# Altium PCB PCB2.PcbDoc
Units mil, origin at the board's own origin, x right, y up, seen from the top; angles counter-clockwise.
Board outline 3000 x 3000 mil, 4 copper layers (Top Layer, Power, GND, Bottom Layer), stack 23.756 mil thick; 81 components, 61 nets, 405 pads, 123 vias.
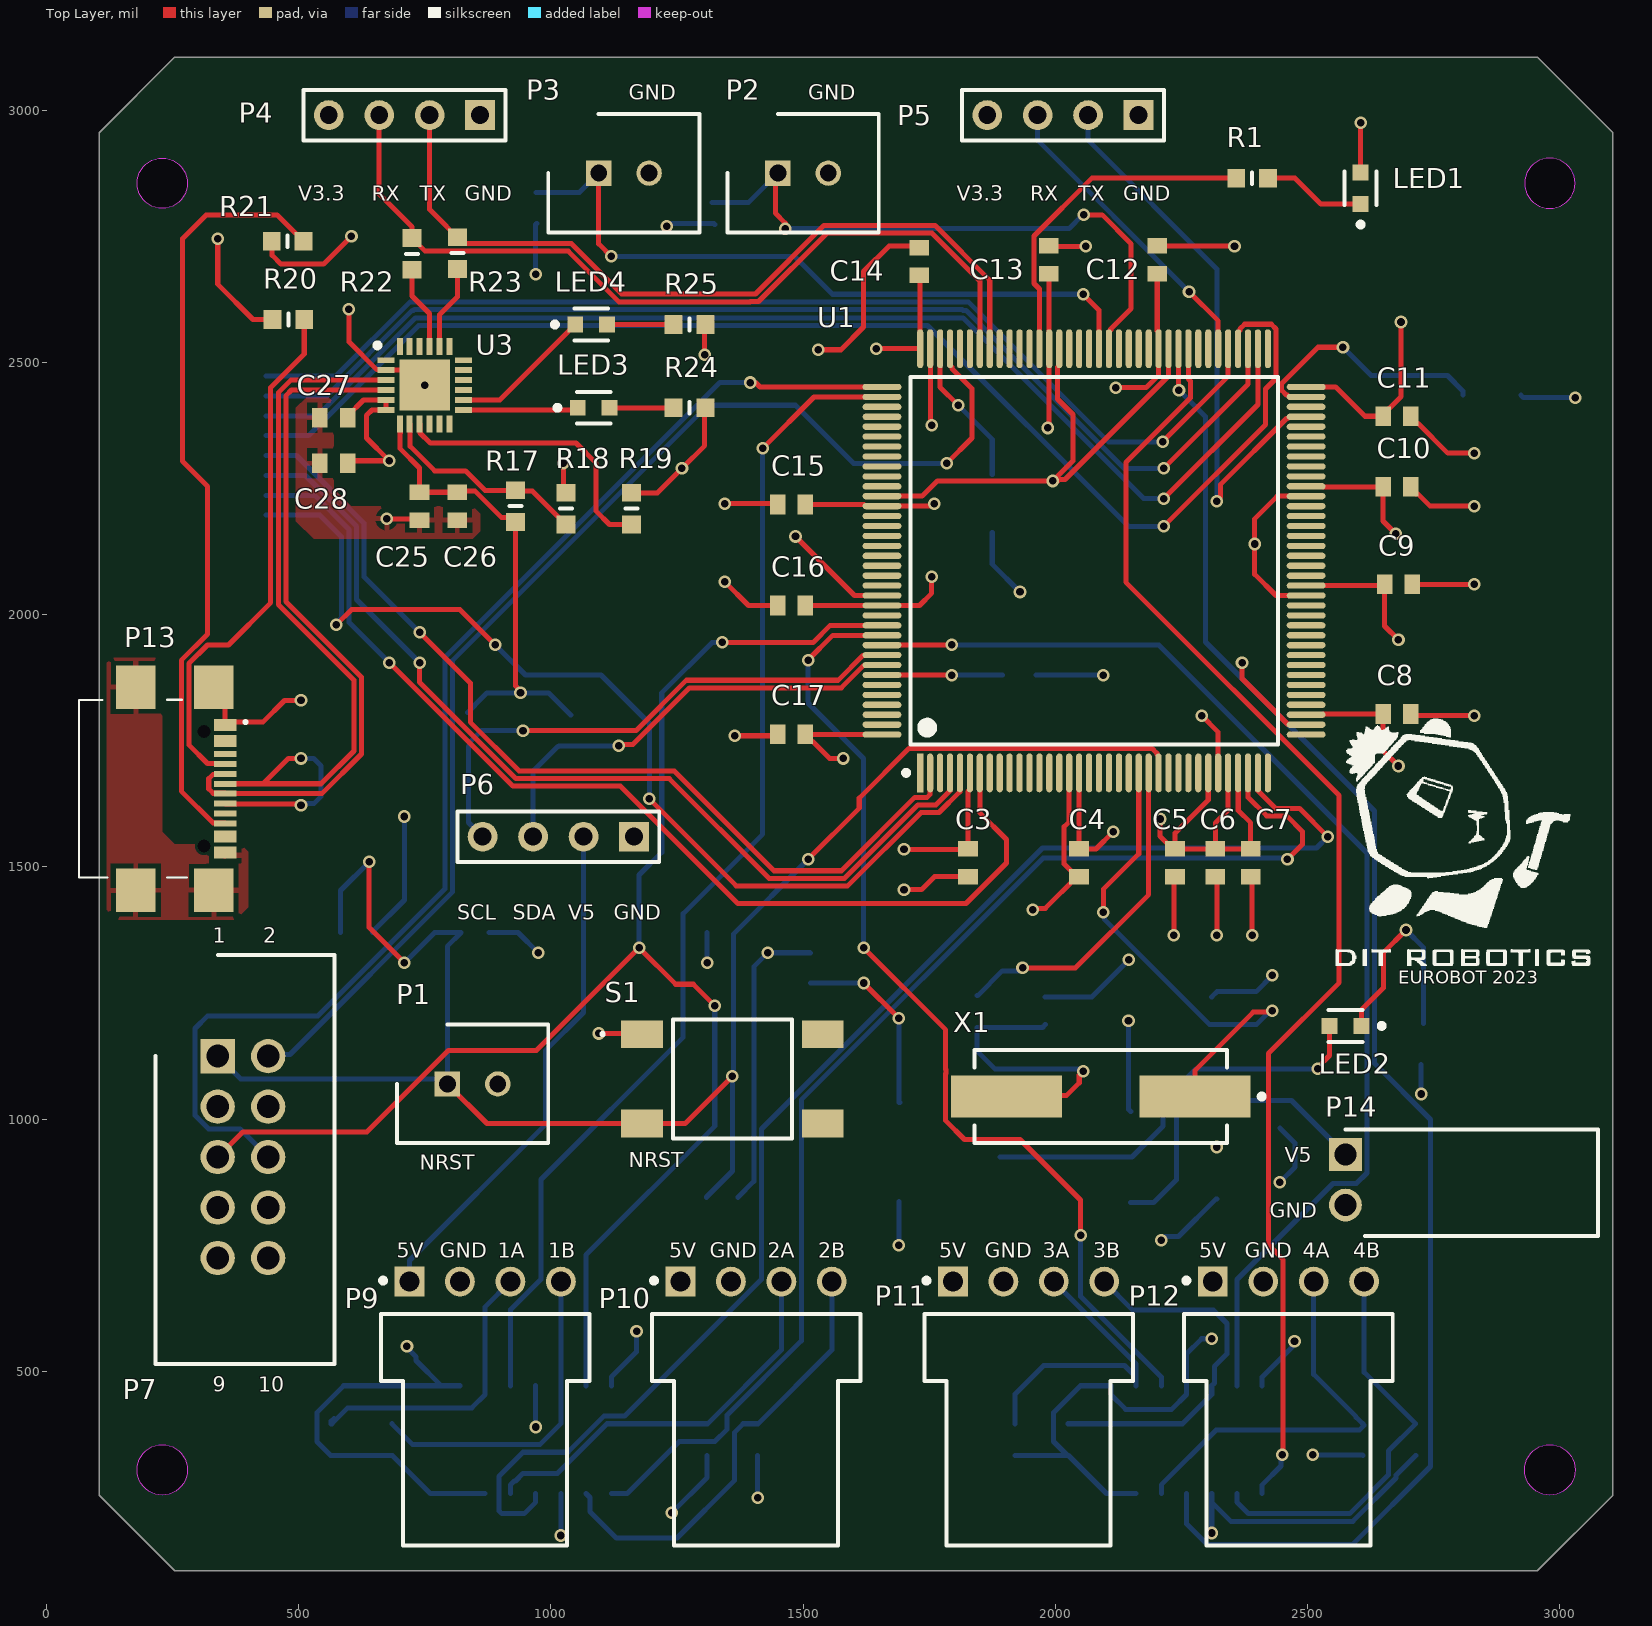
[diagram p0: Top Layer view]
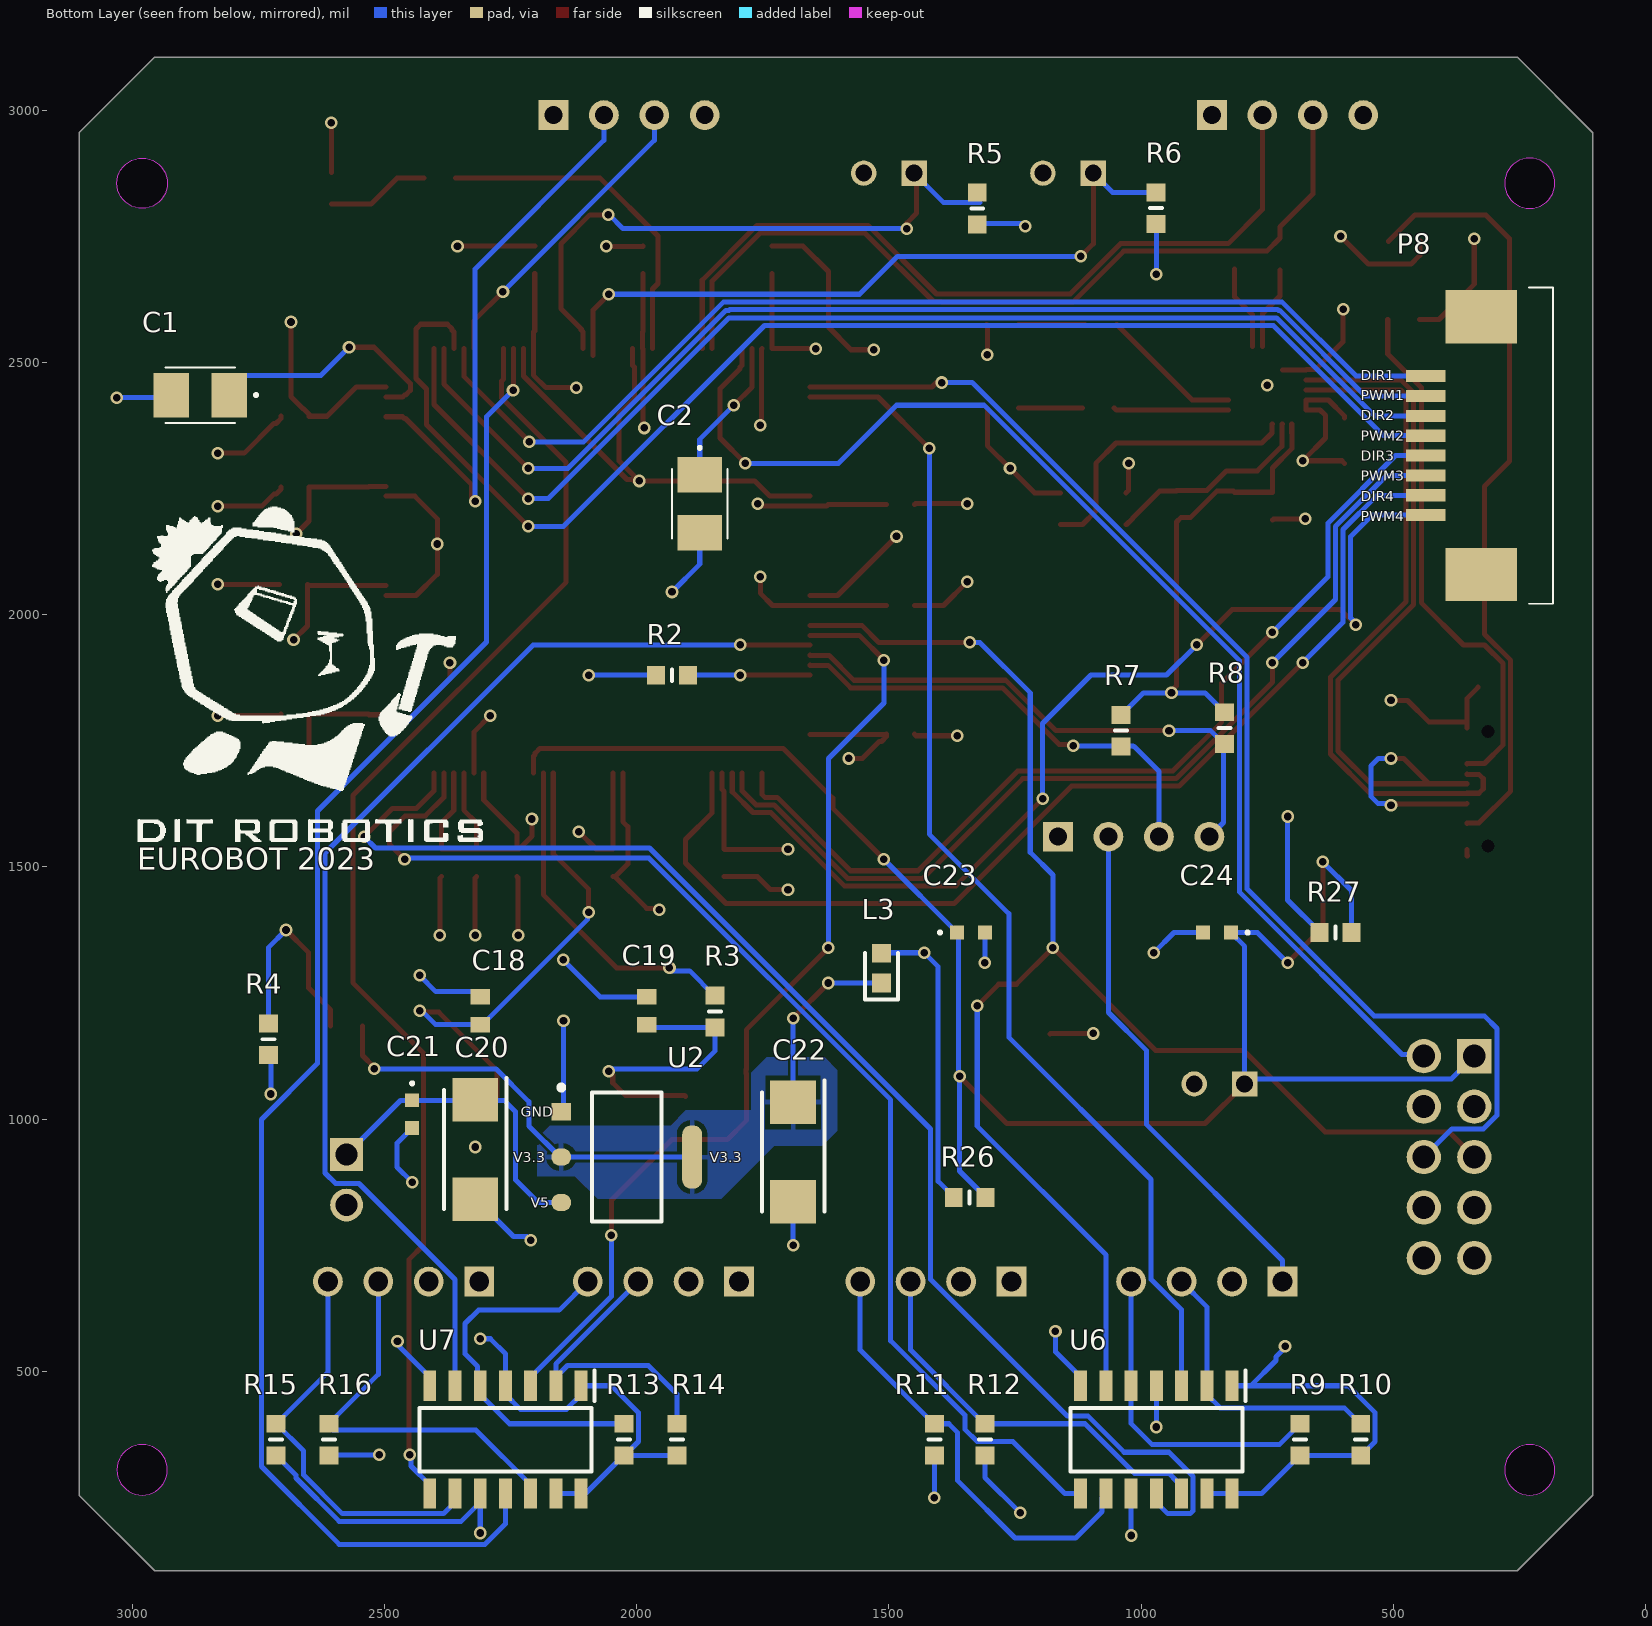
[diagram p1: Bottom Layer view, seen from below]
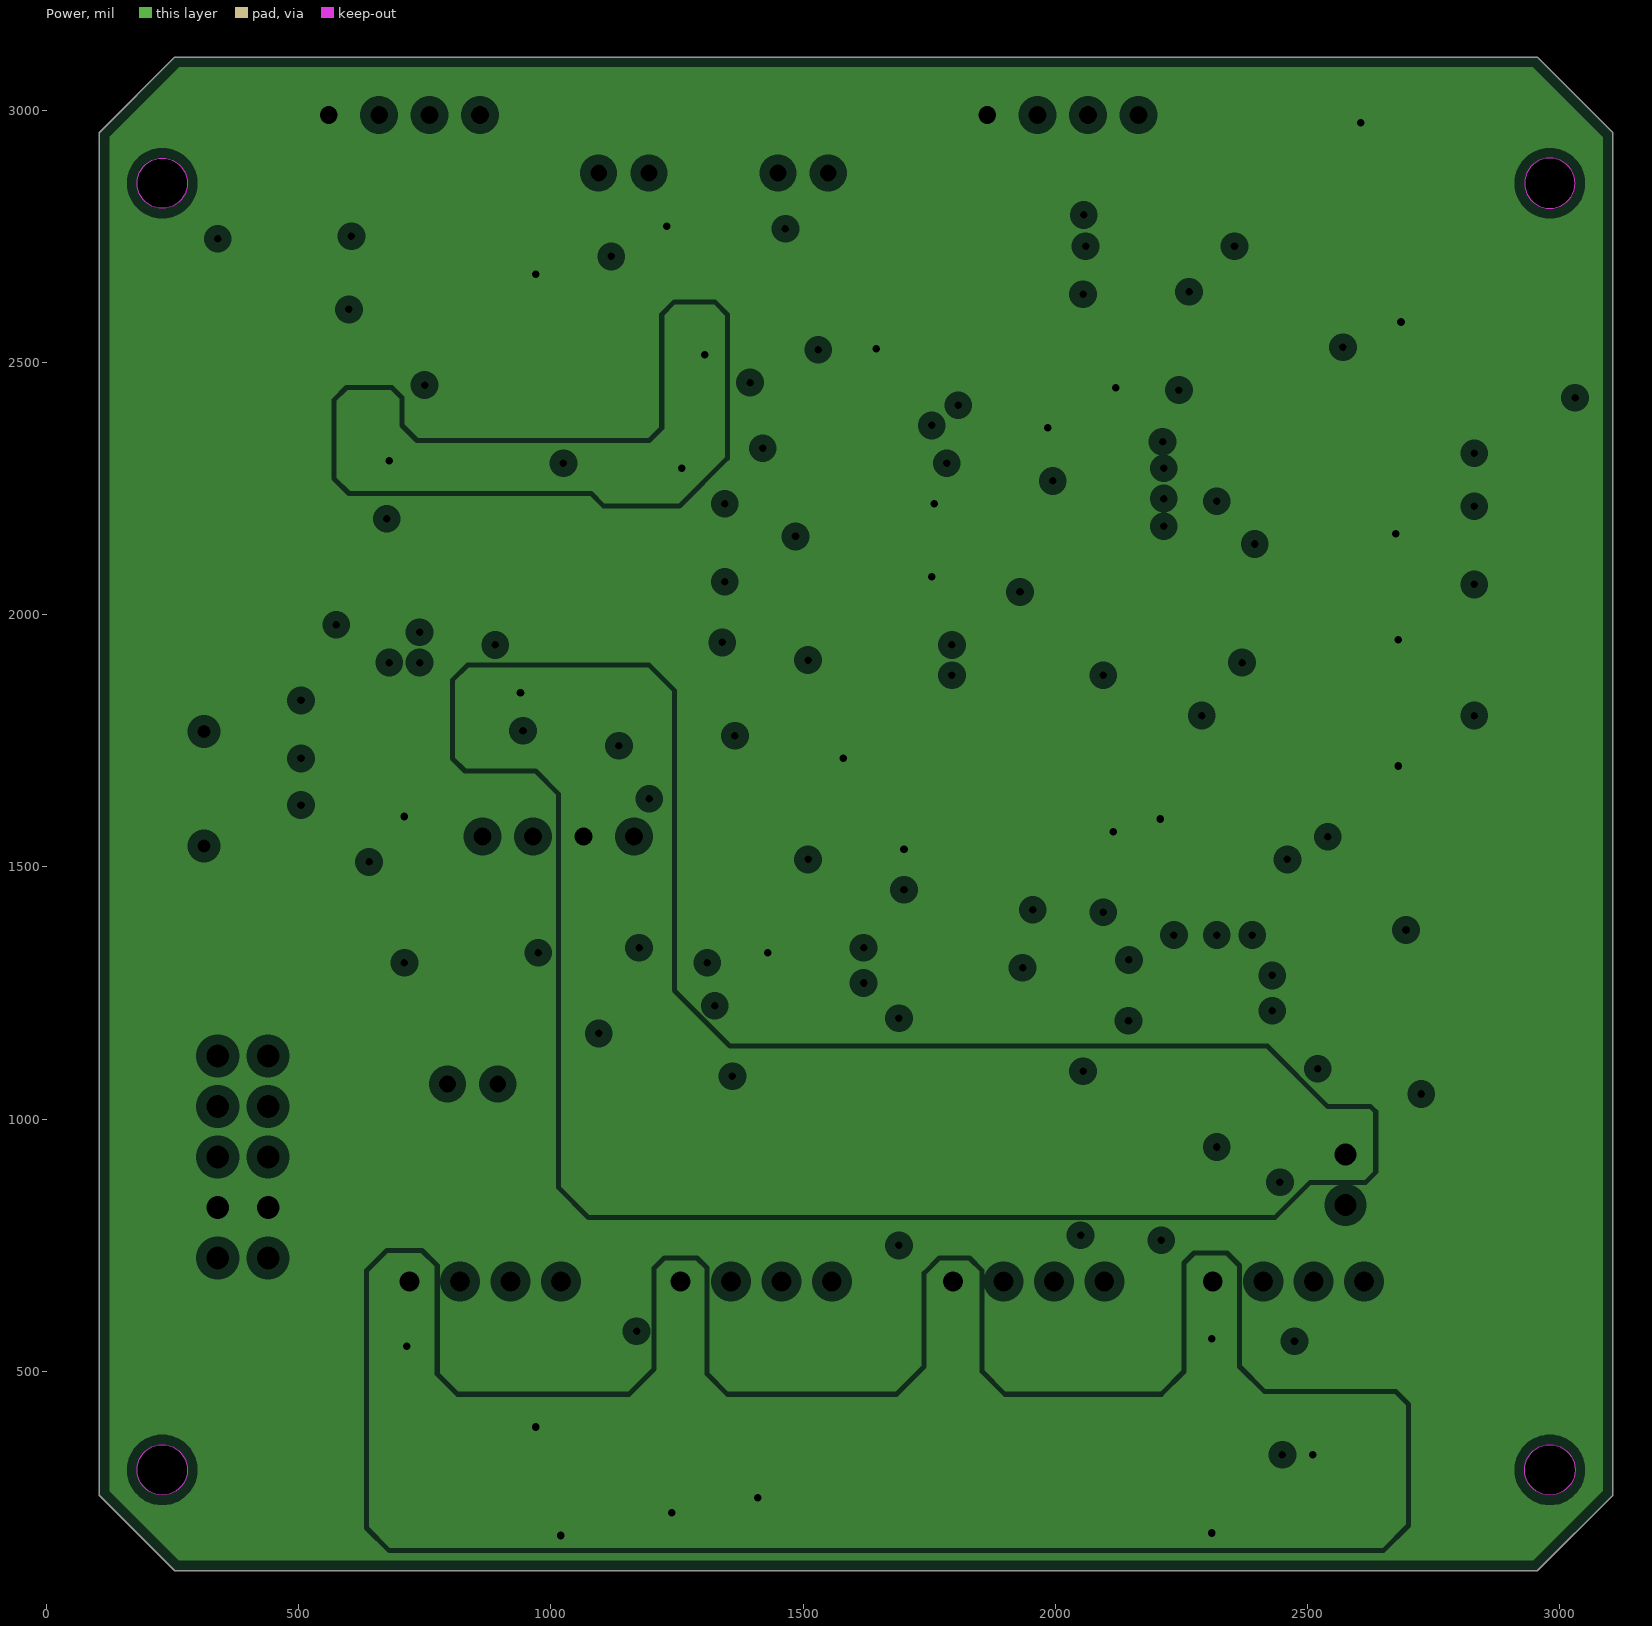
[diagram p2: Power, clearances drawn from the general rule]
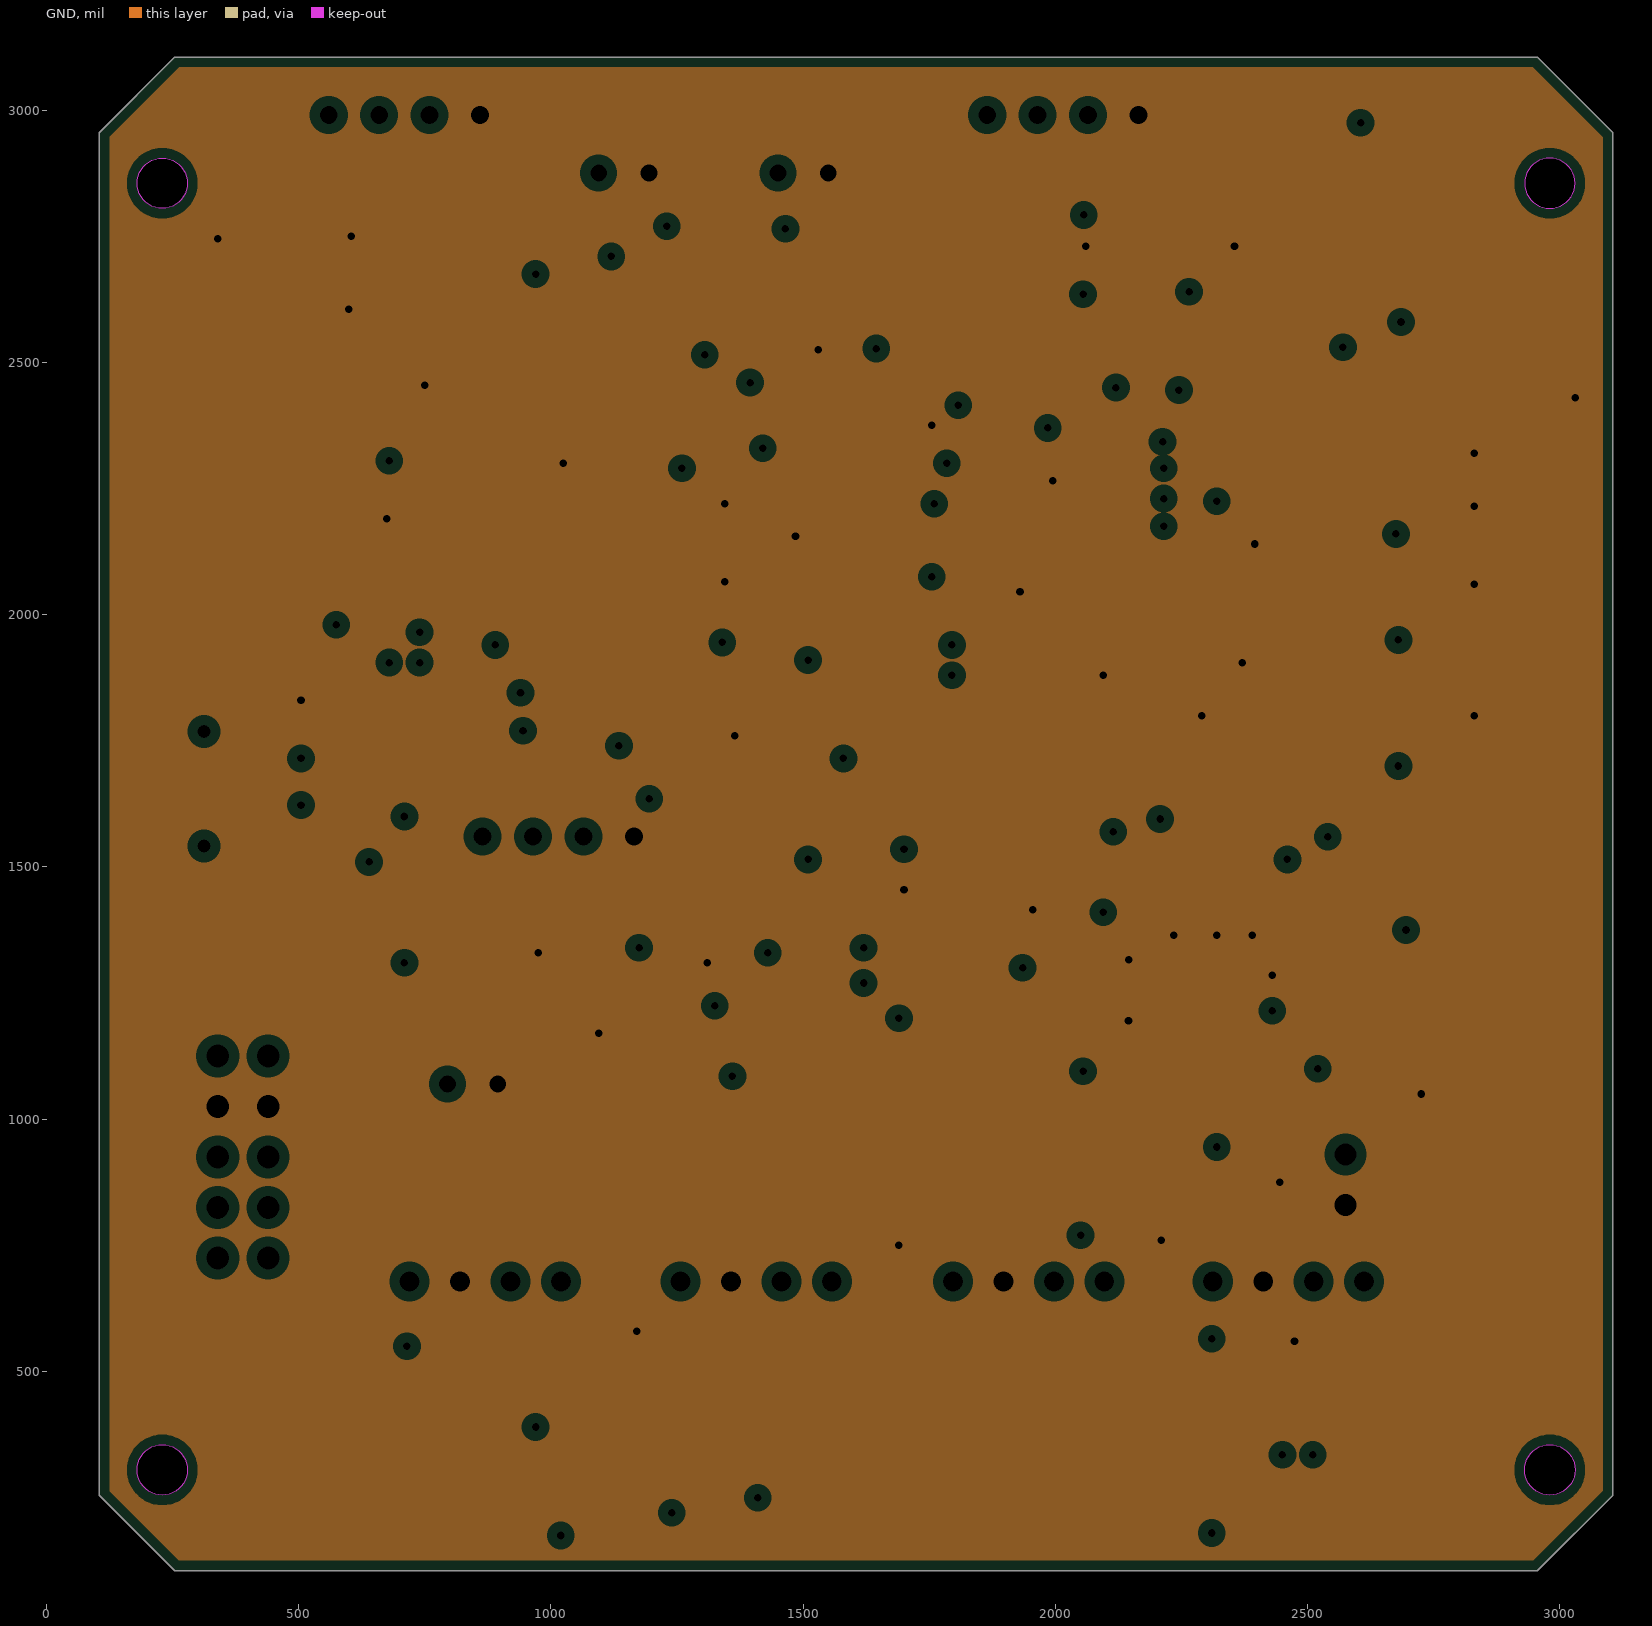
[diagram p3: GND, clearances drawn from the general rule]
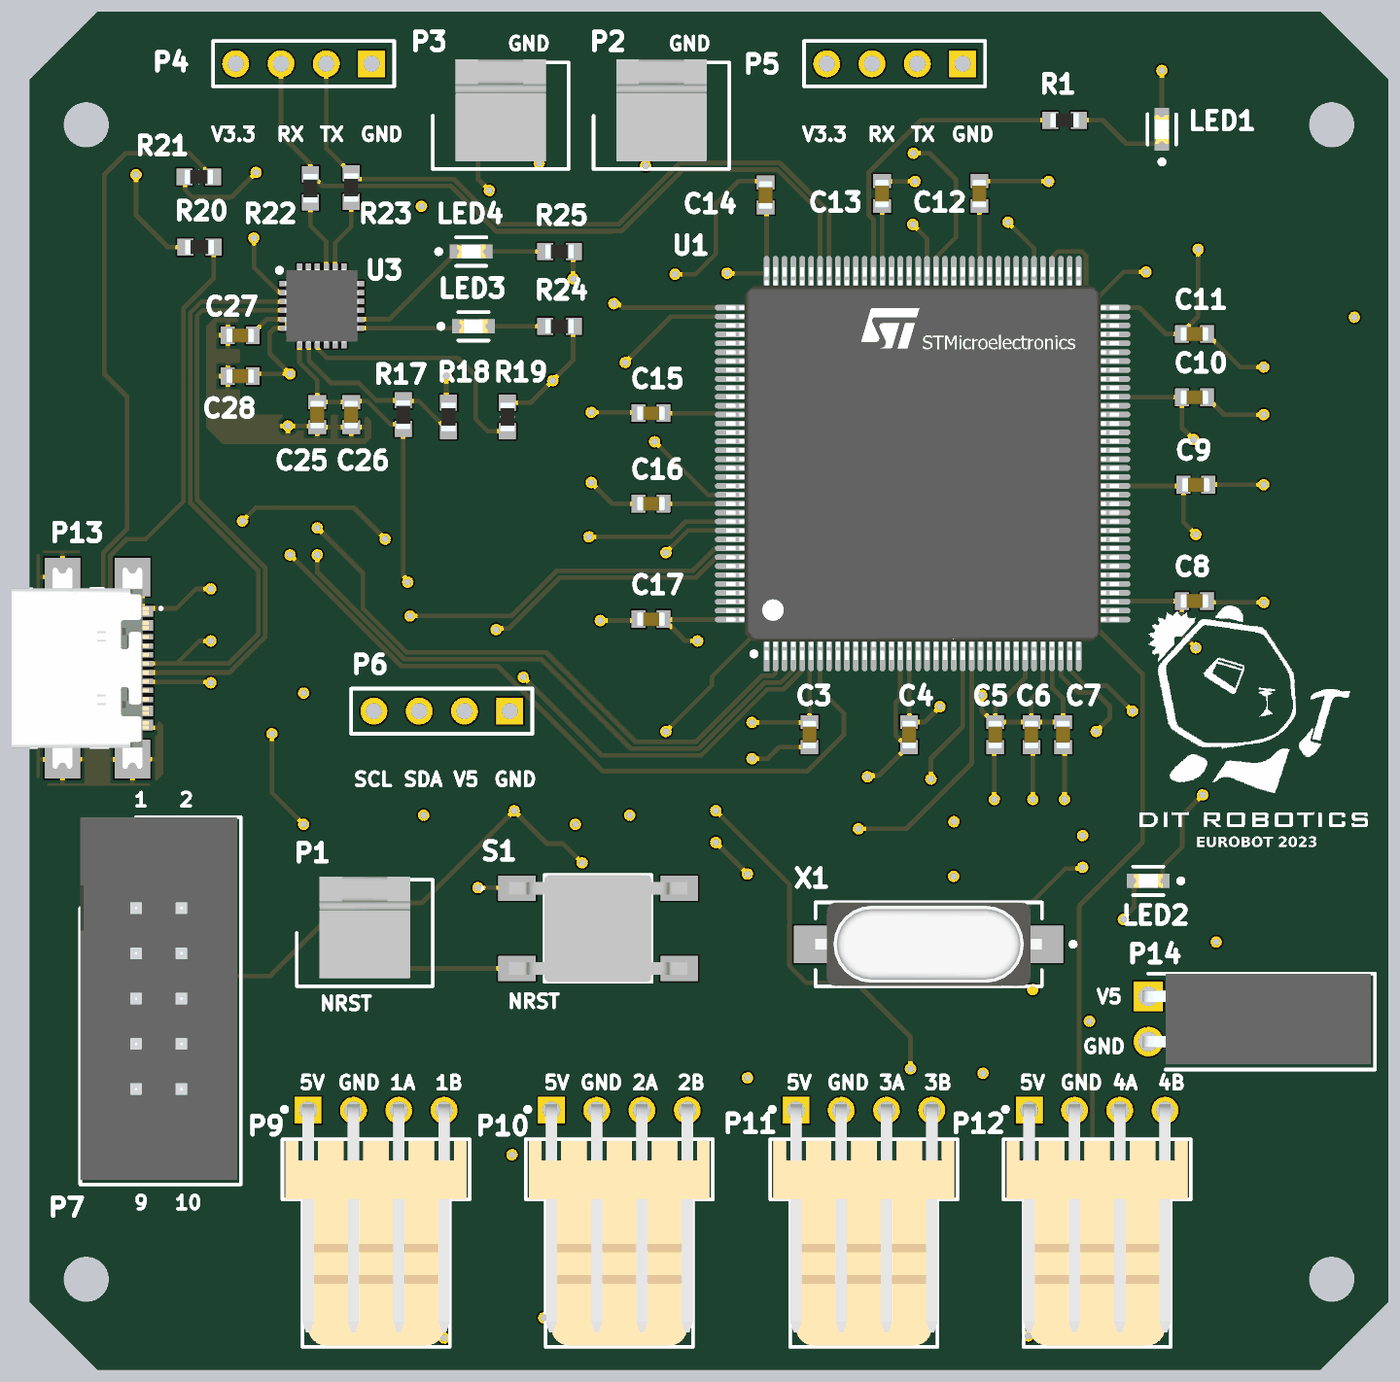
[diagram p4: 3D render of the assembled board from above, using the file's embedded part models]
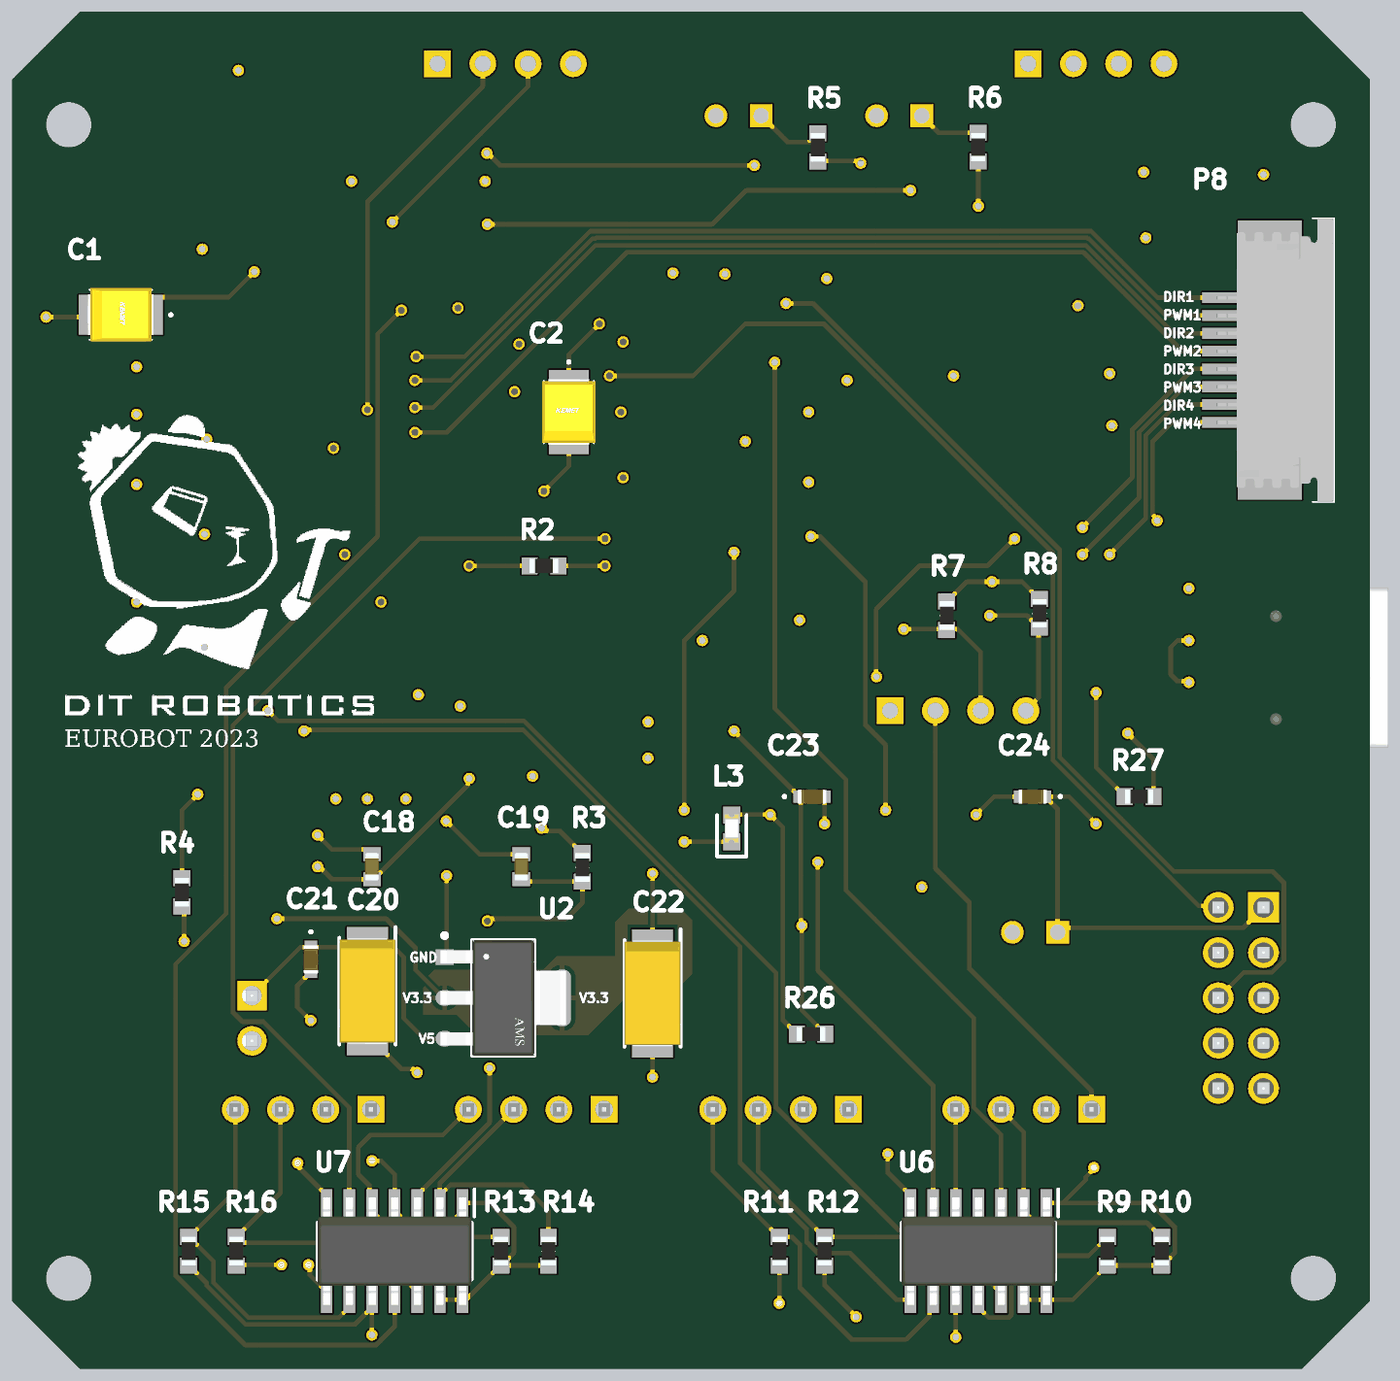
[diagram p5: 3D render of the assembled board from below, using the file's embedded part models]

## Layer stack, top to bottom
Top Solder: solder mask 0.4, Solder Resist, Dk 3.5
Top Layer: signal copper 1.4
Dielectric 2: prepreg 2.8, PP-006, Dk 4.1
Power: plane copper 1.378, net (Multiple Nets)
Dielectric 1: dielectric 12.6, FR-4, Dk 4.8
GND: plane copper 1.378, net GND
Dielectric 3: prepreg 2.8, PP-006, Dk 4.1
Bottom Layer: signal copper 1.4
Bottom Solder: solder mask 0.4, Solder Resist, Dk 3.5

## Board outline
105,255 105,2955 255,3105 2955,3105 3105,2955 3105,255 2955,105 255,105
cut-out: 230,255 cw(c230,305) 180,305 cw(c230,305) 230,355 cw(c230,305) 280,305 cw(c230,305)
cut-out: 230,255 cw(c230,305) 180,305 cw(c230,305) 230,355 cw(c230,305) 280,305 cw(c230,305)
cut-out: 230,2805 cw(c230,2855) 180,2855 cw(c230,2855) 230,2905 cw(c230,2855) 280,2855 cw(c230,2855)
cut-out: 2930,2855 ccw(c2980,2855) 2980,2805 ccw(c2980,2855) 3030,2855 ccw(c2980,2855) 2980,2905 ccw(c2980,2855)
cut-out: 2930,305 cw(c2980,305) 2980,355 cw(c2980,305) 3030,305 cw(c2980,305) 2980,255 cw(c2980,305)

## Design rules (kind name [scope] priority, off if disabled: settings)
Clearance [All] p1: gap=5 ignorepadtopadclearanceinfootprint=FALSE except(0: Arc-Hole Track-Hole SMDPad-Hole THPad-Hole Via-Hole Fill-Hole Poly-Hole Region-Hole Text-Hole)
PlaneClearance [All] p1: clearance=20
PlaneConnect [All] p1: planeconnectstyle=Relief reliefexpansion=20 reliefentries=4 reliefconductorwidth=10 reliefairgap=10
PolygonConnect [All] p1: connectstyle=Relief reliefconductorwidth=10 reliefentries=4 polygonreliefangle="90 Angle" airgapwidth=10
RoutingVias [All] p1: holewidth=15 width=25 viastyle="Through Hole" minholewidth=5 minwidth=15 maxholewidth=28 maxwidth=50
SolderMaskExpansion [All] p1: expansion=4 istentingtop=FALSE
Width [All] p1: maxlimit=10 minlimit=10 preferedwidth=10
28 further rules are at their usual default settings.

## Classes and differential pairs
component class MCU_board_3: P4 P5 P6 P7 P8 P9 P10 P11 P12 R7 R8 R9 R10 R11 R12 R13 R14 R15 R16 U6 U7
component class MCU_board_2: C20 C21 C22 C23 C24 C25 C26 C27 C28 L3 LED2 LED3 LED4 P1 P2 P3 P13 P14 R4 R5 R6 R17 R18 R19 R20 R21 R22 R23 R24 R25 R26 R27 S1 U2 U3
component class MCU_board_1: C1 C2 C3 C4 C5 C6 C7 C8 C9 C10 C11 C12 C13 C14 C15 C16 C17 C18 C19 LED1 R1 R2 R3 U1 X1

## Components (designator, comment, footprint, x,y, rotation, side; value= is the part's Value field where it differs from the comment)
C1 "2.2uF" T598B 2865,2435 r0 bottom
C2 "2.2uF" T598B 1875,2220 r270 bottom
C3 "0.1uF" CAPC1608X90N 1827,1508.19 r270 top
C4 "0.1uF" CAPC1608X90N 2047,1508.19 r270 top
C5 "0.1uF" CAPC1608X90N 2237,1508.19 r270 top
C6 "0.1uF" CAPC1608X90N 2317,1508.19 r270 top
C7 "0.1uF" CAPC1608X90N 2387,1508.19 r270 top
C8 "0.1uF" CAPC1608X90N 2677,1803.19 r0 top
C9 "0.1uF" CAPC1608X90N 2680,2060 r0 top
C10 "0.1uF" CAPC1608X90N 2677,2253.19 r0 top
C11 "0.1uF" CAPC1608X90N 2677,2393.19 r0 top
C12 "0.1uF" CAPC1608X90N 2202,2703.19 r90 top
C13 "0.1uF" CAPC1608X90N 1987,2703.19 r90 top
C14 "0.1uF" CAPC1608X90N 1730,2700 r90 top
C15 "0.1uF" CAPC1608X90N 1477,2218.19 r180 top
C16 "0.1uF" CAPC1608X90N 1477,2018.19 r180 top
C17 "0.1uF" CAPC1608X90N 1477,1763.19 r180 top
C18 "20pF" CAPC1608X90N 2310,1215 r90 bottom
C19 "20pF" CAPC1608X90N 1980,1215 r90 bottom
C20 "22uF" CAPPM6032X280N 2320,940 r270 bottom
C21 "0.1uF" C1608_Commercial 2445,1010 r270 bottom
C22 "22uF" CAPPM6032X280N 1690,935 r270 bottom
C23 "0.1uF" C1608_Commercial 1337.56,1370 r180 bottom
C24 "0.1uF" C1608_Commercial 850,1370 r0 bottom
C25 "4.7uF" CAPC1608X90N 740,2215 r270 top
C26 "0.1uF" CAPC1608X90N 815,2215 r270 top
C27 "0.1uF" CAPC1608X90N 570,2390 r180 top
C28 "4.7uF" CAPC1608X90N 570,2300 r180 top
L3 "742792691" LEDC1608X80N 1515,1299.53 r90 bottom
LED1 "150060RS75000" FP-150060RS75000-MFG 2605,2845 r90 top
LED2 "150060RS75000" FP-150060RS75000-MFG 2575,1185 r180 top
LED3 "150060RS75000" FP-150060RS75000-MFG 1085,2410 r0 top
LED4 "150060RS75000" FP-150060RS75000-MFG 1080,2575 r0 top
P1 "640454-2" HDRV2W66P0X254_1X2_762X572X1003P 795,1070 r0 top
P2 "640454-2" HDRV2W66P0X254_1X2_762X572X1003P 1450,2875 r0 top
P3 "640454-2" HDRV2W66P0X254_1X2_762X572X1003P 1095,2875 r0 top
P4 "UART OUT" HDR1X4 860,2990 r180 top
P5 "UART OUT" HDR1X4 2165,2990 r180 top
P6 "I2C OUT" HDR1X4 1165,1560 r180 top
P7 "ST-LINK" SHDR10W66P254_2X5_2035X880X920P 340,1125 r270 top
P8 "84952-8" 849528 310,2335 r90 bottom
P9 "61900411021" 61900411021 870,385 r0 top locked
P10 "61900411021" 61900411021 1407,385 r0 top
P11 "61900411021" 61900411021 1947,385 r0 top
P12 "61900411021" 61900411021 2462,385 r0 top
P13 "USB4110-GF-A" USB4110GFA 210,1655 r270 top
P14 "61900219521" SHDRRA2W64P0X254_1X2_508X1150X595P 2575,930 r270 top
R1 "1k" RESC1608X55N 2390,2865 r0 top
R2 "10k" RESC1608X55N 1930,1880 r0 bottom
R3 "1k" RESC1608X55N 1845,1213.5 r90 bottom
R4 "1k" RESC1608X55N 2730,1158.5 r270 bottom
R5 "10k" RESC1608X55N 1325,2805 r270 bottom
R6 "10k" RESC1608X55N 970.7,2805.51 r270 bottom
R7 "4.7k" RESC1608X55N 1040,1770 r270 bottom
R8 "4.7k" RESC1608X55N 835,1775 r270 bottom
R9 "1k" RESC1608X55N 685,365 r270 bottom
R10 "1k" RESC1608X55N 565,365 r270 bottom
R11 "1k" RESC1608X55N 1410,365 r270 bottom
R12 "1k" RESC1608X55N 1310,365 r270 bottom
R13 "1k" RESC1608X55N 2025,365 r270 bottom
R14 "1k" RESC1608X55N 1920,365 r270 bottom
R15 "1k" RESC1608X55N 2715,365 r270 bottom
R16 "1k" RESC1608X55N 2610,365 r270 bottom
R17 "22.1k" RESC1608X55N 930,2215 r90 top
R18 "47.5k" RESC1608X55N 1030,2210 r90 top
R19 "1k" RESC1608X55N 1160,2210 r270 top
R20 "5.1k" RESC1608X55N 480,2585 r180 top
R21 "5.1k" RESC1608X55N 478.5,2740 r180 top
R22 "1k" RESC1608X55N 725,2715 r90 top
R23 "1k" RESC1608X55N 815,2716.5 r90 top
R24 "1k" RESC1608X55N 1275,2410 r0 top
R25 "1k" RESC1608X55N 1275,2575 r0 top
R26 "10k" RESC1608X55N 1340,845 r0 bottom
R27 "10k" RESC1608X55N 615,1370 r0 bottom
S1 "FSM2JSMAATR" FSM2J_1 1360,1080 r90 top
U1 "STM32H723ZGT6" FP-LQFP144-1A-IPC_A 2076.71,2106.77 r90 top
U2 "AMS1117-3.3" FP-AMS1117-IPC_C 2019.72,925 r180 bottom
U3 "CP2102N-A02-GQFN24" QFN50P400X400X80-25N-D 750,2455 r0 top
U6 "SN74HC126D" SOIC127P600X175-14N 970,365 r270 bottom
U7 "SN74HC126D" SOIC127P600X175-14N 2260,365 r270 bottom
X1 "ABLS-8.000MHZ-B4-T" ABRA-ABLS-14.7456MHZ-B2-T_V 2090,1045 r180 top

## Footprints (in the part's own frame and the unit in brackets; to place one, negate y for a bottom-side part, rotate by r counter-clockwise, add the part's x,y. Pads: shape width x height; smd on the part's side, far side on the other; paste and mask are expansions set on the pad)
849528 [mm]
  rect 0.61x2 smd: 1(-3.5,3.2) 2(-2.5,3.2) 3(-1.5,3.2) 4(-0.5,3.2) 5(0.5,3.2) 6(1.5,3.2) 7(2.5,3.2) 8(3.5,3.2)
  rect 2.68x3.6 smd: MP1(-6.49,0.4) MP2(6.49,0.4)
  silkscreen extent -7.96,-3.2 7.96,-2, body extent -7.97,-3.14 7.97,3.4, height 2.56
61900411021 [mm] "2.54mm Male Left Angled Header Bottom Locking, 4p"
  rect 1.5x1.5 hole 1: 1(-3.81,7.45)
  round 1.5 hole 1: 2(-1.27,7.45) 3(1.27,7.45) 4(3.81,7.45)
  silkscreen extent -5.26,-5.82 5.25,7.62, body extent -5.08,-5.75 5.08,7.77, height 5.83
ABRA-ABLS-14.7456MHZ-B2-T_V [mm] "SMD, 2-Leads, Body 11.4x4.7mm"
  rect 5.6x2.1 smd: 1(-4.75,0) 2(4.75,0)
  silkscreen extent -8.23,-2.35 6.35,2.35, body extent -6.35,-2.35 6.35,2.35, height 4.16
C1608_Commercial [mm]
  rect 0.7x0.7 smd: 1(-0.7,0) 2(0.7,0)
  silkscreen extent -1.6,-0.05 -1.5,0.05, body extent -0.8,-0.4 0.8,0.4, height 0.8
CAPC1608X90N [mm]
  rect 0.78x0.99 smd: 1(-0.7,0) 2(0.7,0)
  body extent -0.8,-0.41 0.8,0.41, height 0.9
CAPPM6032X280N [mm]
  rect 2.2x2.3 smd: 1(-2.5,0) 2(2.5,0)
  silkscreen extent -3.6,-1.58 3,1.58, body extent -3,-1.58 3,1.58, height 2.8
FP-150060RS75000-MFG [mm]
  rect 0.8x0.8 smd paste+0 mask+0: 1(-0.8,0) 2(0.8,0)
  silkscreen extent -1.95,-0.8 0.85,0.8, body extent -1.3,-0.55 1.3,0.55, height 0.25
FP-AMS1117-IPC_C [mm]
  rect 1.004x0.872 smd paste+0 mask+0: 1(-3.295,2.29)
  rrect100% 1.004x0.872 smd paste+0 mask+0: 2(-3.295,0) 3(-3.295,-2.29)
  rrect87% 1.004x3.182 smd paste+0 mask+0: 4(3.295,0)
  silkscreen extent -3.42,-3.25 1.75,3.62, body extent -3.53,-3.25 3.53,3.25, height 1.8
FP-LQFP144-1A-IPC_A [mm]
  rect 1.955x0.312 smd paste+0 mask+0: 1(-10.675,8.75)
  rrect100% 1.955x0.312 smd paste+0 mask+0: 2(-10.675,8.25) 3(-10.675,7.75) 4(-10.675,7.25) 5(-10.675,6.75) 6(-10.675,6.25) 7(-10.675,5.75) 8(-10.675,5.25) 9(-10.675,4.75) 10(-10.675,4.25) 11(-10.675,3.75) 12(-10.675,3.25) 13(-10.675,2.75) 14(-10.675,2.25) 15(-10.675,1.75) 16(-10.675,1.25) 17(-10.675,0.75) 18(-10.675,0.25) 19(-10.675,-0.25) 20(-10.675,-0.75) 21(-10.675,-1.25) 22(-10.675,-1.75) 23(-10.675,-2.25) 24(-10.675,-2.75) 25(-10.675,-3.25) 26(-10.675,-3.75) 27(-10.675,-4.25) 28(-10.675,-4.75) 29(-10.675,-5.25) 30(-10.675,-5.75) 31(-10.675,-6.25) 32(-10.675,-6.75) 33(-10.675,-7.25) 34(-10.675,-7.75) 35(-10.675,-8.25) 36(-10.675,-8.75) 73(10.675,-8.75) 74(10.675,-8.25) 75(10.675,-7.75) 76(10.675,-7.25) 77(10.675,-6.75) 78(10.675,-6.25) 79(10.675,-5.75) 80(10.675,-5.25) 81(10.675,-4.75) 82(10.675,-4.25) 83(10.675,-3.75) 84(10.675,-3.25) 85(10.675,-2.75) 86(10.675,-2.25) 87(10.675,-1.75) 88(10.675,-1.25) 89(10.675,-0.75) 90(10.675,-0.25) 91(10.675,0.25) 92(10.675,0.75) 93(10.675,1.25) 94(10.675,1.75) 95(10.675,2.25) 96(10.675,2.75) 97(10.675,3.25) 98(10.675,3.75) 99(10.675,4.25) 100(10.675,4.75) 101(10.675,5.25) 102(10.675,5.75) 103(10.675,6.25) 104(10.675,6.75) 105(10.675,7.25) 106(10.675,7.75) 107(10.675,8.25) 108(10.675,8.75)
  rrect100% 0.312x1.955 smd paste+0 mask+0: 37(-8.75,-10.675) 38(-8.25,-10.675) 39(-7.75,-10.675) 40(-7.25,-10.675) 41(-6.75,-10.675) 42(-6.25,-10.675) 43(-5.75,-10.675) 44(-5.25,-10.675) 45(-4.75,-10.675) 46(-4.25,-10.675) 47(-3.75,-10.675) 48(-3.25,-10.675) 49(-2.75,-10.675) 50(-2.25,-10.675) 51(-1.75,-10.675) 52(-1.25,-10.675) 53(-0.75,-10.675) 54(-0.25,-10.675) 55(0.25,-10.675) 56(0.75,-10.675) 57(1.25,-10.675) 58(1.75,-10.675) 59(2.25,-10.675) 60(2.75,-10.675) 61(3.25,-10.675) 62(3.75,-10.675) 63(4.25,-10.675) 64(4.75,-10.675) 65(5.25,-10.675) 66(5.75,-10.675) 67(6.25,-10.675) 68(6.75,-10.675) 69(7.25,-10.675) 70(7.75,-10.675) 71(8.25,-10.675) 72(8.75,-10.675) 109(8.75,10.675) 110(8.25,10.675) 111(7.75,10.675) 112(7.25,10.675) 113(6.75,10.675) 114(6.25,10.675) 115(5.75,10.675) 116(5.25,10.675) 117(4.75,10.675) 118(4.25,10.675) 119(3.75,10.675) 120(3.25,10.675) 121(2.75,10.675) 122(2.25,10.675) 123(1.75,10.675) 124(1.25,10.675) 125(0.75,10.675) 126(0.25,10.675) 127(-0.25,10.675) 128(-0.75,10.675) 129(-1.25,10.675) 130(-1.75,10.675) 131(-2.25,10.675) 132(-2.75,10.675) 133(-3.25,10.675) 134(-3.75,10.675) 135(-4.25,10.675) 136(-4.75,10.675) 137(-5.25,10.675) 138(-5.75,10.675) 139(-6.25,10.675) 140(-6.75,10.675) 141(-7.25,10.675) 142(-7.75,10.675) 143(-8.25,10.675) 144(-8.75,10.675)
  silkscreen extent -10.8,-9.25 9.25,9.58, body extent -12.15,-12.15 12.15,12.15, height 0.25
FSM2J_1 [mm]
  rect 1.4x2.1 smd: 1(2.25,4.55) 2(2.25,-4.55) 3(-2.25,4.55) 4(-2.25,-4.55)
  silkscreen extent -3,-3 3,6.59, body extent -3,-5 3,5, height 4.38
HDR1X4 [mm] "Connector; Header; 4 Position"
  rect 1.5x1.5 hole 0.9: 1(0,0)
  round 1.5 hole 0.9: 2(2.54,0) 3(5.08,0) 4(7.62,0)
  silkscreen extent -1.27,-1.27 8.89,1.27
HDRV2W66P0X254_1X2_762X572X1003P [mm]
  rect 1.275x1.275 hole 0.85: 1(0,0)
  round 1.275 hole 0.85: 2(2.54,0)
  silkscreen extent -2.54,-2.99 5.08,2.99, body extent -1.27,-2.55 3.81,3.17, height 9.91
LEDC1608X80N [mm]
  rect 0.95x0.95 smd: 1(-0.75,0) 2(0.75,0)
  silkscreen extent -1.58,-0.82 0.75,0.82, body extent -0.8,-0.4 0.8,0.4, height 0.7
QFN50P400X400X80-25N-D [mm]
  rect 0.85x0.3 smd: 1(-1.95,1.25) 2(-1.95,0.75) 3(-1.95,0.25) 4(-1.95,-0.25) 5(-1.95,-0.75) 6(-1.95,-1.25) 13(1.95,-1.25) 14(1.95,-0.75) 15(1.95,-0.25) 16(1.95,0.25) 17(1.95,0.75) 18(1.95,1.25)
  rect 0.3x0.85 smd: 7(-1.25,-1.95) 8(-0.75,-1.95) 9(-0.25,-1.95) 10(0.25,-1.95) 11(0.75,-1.95) 12(1.25,-1.95) 19(1.25,1.95) 20(0.75,1.95) 21(0.25,1.95) 22(-0.25,1.95) 23(-0.75,1.95) 24(-1.25,1.95)
  rect 2.55x2.55 smd: 25(0,0)
  silkscreen extent -2.5,1.88 -2.25,2.12, body extent -2.05,-2.05 2.05,2.05, height 0.8
RESC1608X55N [mm]
  rect 0.9x0.95 smd: 1(-0.8,0) 2(0.8,0)
  silkscreen extent 0,-0.3 0,0.3, body extent -0.8,-0.4 0.8,0.4, height 0.55
SHDR10W66P254_2X5_2035X880X920P [mm]
  rect 1.725x1.725 hole 1.15: 1(0,0)
  round 1.725 hole 1.15: 2(0,2.54) 3(2.54,0) 4(2.54,2.54) 5(5.08,0) 6(5.08,2.54) 7(7.62,0) 8(7.62,2.54) 9(10.16,0) 10(10.16,2.54)
  silkscreen extent -5.1,-3.13 15.51,5.87, body extent -5.1,-3.13 15.26,5.67, height 9.2
SHDRRA2W64P0X254_1X2_508X1150X595P [mm]
  rect 1.65x1.65 hole 1.1: 1(0,0)
  round 1.65 hole 1.1: 2(2.54,0)
  silkscreen extent -1.27,0 4.11,12.72, body extent -1.27,-0.32 3.81,12.47, height 5.95
SOIC127P600X175-14N [mm]
  rect 1.525x0.65 smd: 1(-2.712,3.81) 2(-2.712,2.54) 3(-2.712,1.27) 4(-2.712,0) 5(-2.712,-1.27) 6(-2.712,-2.54) 7(-2.712,-3.81) 8(2.712,-3.81) 9(2.712,-2.54) 10(2.712,-1.27) 11(2.712,0) 12(2.712,1.27) 13(2.712,2.54) 14(2.712,3.81)
  silkscreen extent -3.47,-4.33 1.6,4.48, body extent -3.01,-4.32 3.01,4.34, height 1.75
T598B [mm]
  rect 1.8x2.23 smd: 1(-1.46,0) 2(1.46,0)
  silkscreen extent -2.86,-1.4 1.75,1.4, body extent -1.85,-1.5 1.85,1.5, height 2.1
USB4110GFA [mm]
  rect 0.3x1.15 smd: A1(-3.35,3.678) A4(-2.55,3.678) A5(-1.25,3.678) A6(-0.25,3.678) A7(0.25,3.678) A8(1.25,3.678) A9(2.55,3.678) A12(3.35,3.678) B1(3.05,3.678) B4(2.25,3.678) B5(1.75,3.678) B6(0.75,3.678) B7(-0.75,3.678) B8(-1.75,3.678) B9(-2.25,3.678) B12(-3.05,3.678)
  round 0.325 hole 0.65 unplated: MH1(-2.89,2.603) MH2(2.89,2.603)
  rect 2.18x2 smd: MP1(-5.11,-0.827) MP2(5.11,-0.827) MP3(-5.11,3.103) MP4(5.11,3.103)
  silkscreen extent -4.5,-3.68 4.47,4.75, body extent -5.65,-3.68 5.65,4.02, height 3.26

## Part data
C1 C2: library part T598B225M035ATE150, "Capacitor Polarised", Manufacturer_Name=KEMET, Mouser Part Number=80-T598B225M35ATE150, Datasheet Link=https://content.kemet.com/datasheets/KEM_T2073_T59X.pdf, Height=2.1mm, Manufacturer_Part_Number=T598B225M035ATE150, Mouser Price/Stock=https://www.mouser.co.uk/ProductDetail/KEMET/T598B225M035ATE150?qs=wnTfsH77Xs5uc%252Bb8LBvYtg%3D%3D
C3 C4 C5 C6 C7 C8 C9 C10 C11 C12 C13 C14 C15 C16 C17 C25 C26 C27 C28: library part GRM188R72A104MA35D, "Capacitor", Manufacturer_Name="Murata Electronics", Mouser Part Number=81-GRM188R72A104MA5D, Arrow Part Number=GRM188R72A104MA35D, Arrow Price/Stock=https://www.arrow.com/en/products/grm188r72a104ma35d/murata-manufacturing?region=nac, Height=0.9mm, Manufacturer_Part_Number=GRM188R72A104MA35D, Mouser Price/Stock=https://www.mouser.co.uk/ProductDetail/Murata-Electronics/GRM188R72A104MA35D?qs=QdePRyQsNGaEtttrWFG%2FPQ%3D%3D
C18 C19: library part 06035A200FAT2A, "Capacitor", Manufacturer_Name=AVX, Mouser Part Number=581-06035A200FAT2A, Datasheet Link=https://componentsearchengine.com/Datasheets/1/06031A100FAT2A.pdf, Height=0.9mm, Manufacturer_Part_Number=06035A200FAT2A, Mouser Price/Stock=https://www.mouser.co.uk/ProductDetail/AVX/06035A200FAT2A?qs=0yaOSdwiqWsd0YnmvPoF5Q%3D%3D
C20 C22: library part TAJC226K025RNJ, "Capacitor Polarised", Manufacturer_Name=AVX, Mouser Part Number=581-TAJC226K025R, Arrow Part Number=TAJC226K025RNJ, Arrow Price/Stock=https://www.arrow.com/en/products/tajc226k025rnj/avx, Datasheet Link=http://datasheets.avx.com/TAJ.pdf, Height=2.8mm, Manufacturer_Part_Number=TAJC226K025RNJ, Mouser Price/Stock=https://www.mouser.co.uk/ProductDetail/AVX/TAJC226K025RNJ?qs=ZfDiupplM3TXvWbrzYGnnA%3D%3D
C21 C23 C24: library part C1608X7R1H334K080AC, "Capacitor", Manufacturer_Name=TDK, Mouser Part Number=810-C1608X7R1H334K, Arrow Part Number=C1608X7R1H334K080AC, Arrow Price/Stock=https://www.arrow.com/en/products/c1608x7r1h334k080ac/tdk, Datasheet Link=https://product.tdk.com/system/files/dam/doc/product/capacitor/ceramic/mlcc/catalog/mlcc_commercial_general_en.pdf, Height=0.9mm, Manufacturer_Part_Number=C1608X7R1H334K080AC, Mouser Price/Stock=https://www.mouser.co.uk/ProductDetail/TDK/C1608X7R1H334K080AC?qs=NRhsANhppD%252BuOqJgCMjUlg%3D%3D
L3: "Inductor", Manufacturer_Name="Wurth Elektronik", Mouser Part Number=710-742792691, Height=0.8mm, Manufacturer_Part_Number=742792691, Mouser Price/Stock=https://www.mouser.com/Search/Refine.aspx?Keyword=710-742792691
LED1 LED2 LED3 LED4: library part CMP-1426-00001-2, "LED RED CLEAR 0603 SMD", Case Code (Imperial)=0603, Case Code (Metric)=1608, Color=Red, Forward Current=30mA, Forward Voltage=2V, Lens Color=Colorless, Max Operating Temperature=85°C, Min Operating Temperature=-40°C, Package Quantity=1, Test Current=20mA, Case/Package=0603, Dominant Wavelength=625nm, Height=0.8mm, Length=1.6mm, Lens Size=0.7mm, Lens Style=Clear, Lens Transparency=Clear, Luminous Intensity=250mcd, Mount="Surface Mount", Packaging="Cut Tape", RoHS Compliant=Yes, Series=WL-SMCW, Viewing Angle=140°, Wavelength=625nm, Width=0.8mm
P1 P2 P3: "Connector", Manufacturer_Name="TE Connectivity", Datasheet Link=https://datasheet.datasheetarchive.com/originals/distributors/Datasheets_SAMA/0152b3901a0ba380c7a54e62cba96e15.pdf, Height=10.03mm, Manufacturer_Part_Number=640454-2
P4 P5 P6: library part "Header 4", "Header, 4-Pin", LatestRevisionDate=17-Jul-2002, LatestRevisionNote="Re-released for DXP Platform.", Publisher="Altium Limited"
P7: library part 1-1634688-0, "Connector", Manufacturer_Name="TE Connectivity", Datasheet Link=https://componentsearchengine.com/Datasheets/2/1-1634688-0.pdf, Height=9.2mm, Manufacturer_Part_Number=1-1634688-0
P8: "Connector", Manufacturer_Name="TE Connectivity", Mouser Part Number=571-84952-8, Arrow Part Number=84952-8, Arrow Price/Stock=https://www.arrow.com/en/products/84952-8/te-connectivity?region=europe, Datasheet Link=https://www.te.com/commerce/DocumentDelivery/DDEController?Action=showdoc&DocId=Customer+Drawing%7F84952%7FA4%7Fpdf%7FEnglish%7FENG_CD_84952_A4.pdf%7F84952-8, Height=2.74mm, Manufacturer_Part_Number=84952-8, Mouser Price/Stock=https://www.mouser.co.uk/ProductDetail/TE-Connectivity/84952-8?qs=uUkeXfjQ8uTKEYAHE0dNDQ%3D%3D
P9 P10 P11 P12: library part CMP-1502-00594-1, "Male Bottom Locking Header WR-WTB, THT, Right Angled, pitch 2.54 mm, 1 x 4 position", Contact Resistance=20mOhm, Manufacturer="Wurth Elektronik", Operating Temperature=-40to105degC, Working Voltage=250VAC, Datasheet URL=https://katalog.we-online.de/em/datasheet/6190xx11021.pdf, Gender=Male, Manufacturer URL=http://www.we-online.de, Mounting Technology=THT, Orientation=RightAngled, Package Reference=61900411021, Packaging=Bag, Part Number=61900411021, Pitch=2.54mm, Position=1x4, Publisher=WurthElektronik
P13: "Connector", Manufacturer_Name="GCT (GLOBAL CONNECTOR TECHNOLOGY)", Mouser Part Number=640-USB4110-GF-A, Datasheet Link=https://gct.co/files/drawings/usb4110.pdf, Height=3.26mm, Manufacturer_Part_Number=USB4110-GF-A, Mouser Price/Stock=https://www.mouser.co.uk/ProductDetail/GCT/USB4110-GF-A?qs=KUoIvG%2F9IlYiZvIXQjyJeA%3D%3D
P14: "Connector", Manufacturer_Name="Wurth Elektronik", Mouser Part Number=710-61900219521, Datasheet Link=https://componentsearchengine.com/Datasheets/1/61900219521.pdf, Height=5.95mm, Manufacturer_Part_Number=61900219521, Mouser Price/Stock=https://www.mouser.co.uk/ProductDetail/Wurth-Elektronik/61900219521?qs=W%252B2sBeLta1aXbrC28D3FtA%3D%3D
R1 R2 R3 R4 R5 R6 R7 R8 R9 R10 R11 R12 R13 R14 R15 R16 R17 R18 R19 R20 R21 R22 R23 R24 R25 R26 R27: library part CMP0603-FX-1003ELF, "Resistor", Manufacturer_Name=Bourns, Datasheet Link=https://www.mouser.co.uk/datasheet/2/54/Bourns_CMP_Datasheet_05.28.20-1854233.pdf, Height=0.55mm, Manufacturer_Part_Number=CMP0603-FX-1003ELF
S1: "Switch", Manufacturer_Name="TE Connectivity", Datasheet Link=http://www.te.com/commerce/DocumentDelivery/DDEController?Action=showdoc&DocId=Customer+Drawing%7F2-1437565-7%7FV%7Fpdf%7FEnglish%7FENG_CD_2-1437565-7_V.pdf%7F2-1437565-9, Manufacturer_Part_Number=FSM2JSMAATR
U1: library part CMP-12105-000148-1, "IC MCU 32BIT 1MB FLASH 144LQFP"
U2: library part CMP-209535-000001-1, "LDO Voltage Regulators 1A, 3.3V", Dropout Voltage=1.1V, Manufacturer="Advanced Monolithic Systems", Max Junction Temp=+125°C, Max Power Dissipation=1.2W, Max Supply Voltage=15V, Nominal Supply Current=5mA, Output Current=1A, Output Voltage=3.3V, Package=AMS1117, Temperature="-40°C to +125°C", Temperature Range Low=-40°C, Automotive=No, Category=IC, ComponentLink2Description=Datasheet, ComponentLink2URL=http://www.advanced-monolithic.com/pdf/ds1117.pdf, Device Class L1="Integrated Circuits (ICs)", Device Class L2="Power Management ICs", Device Class L3="Voltage Regulators - Linear", Height=1.8mm, Ipc Land Pattern Name=SOT229P700X180-4, Lead Free=Yes, Manufacturer Part Number=AMS1117-3.3, Number Of Outputs=1, Octopart=https://octopart.com/ams1117-3.3-advanced+monolithic+systems-25899300, Output Type=Fixed, RoHS=TRUE, Standoff Height=0.64mm, Temperature Range High=+125°C
U3: "Integrated Circuit", Manufacturer_Name="Silicon Labs", Mouser Part Number=634-CP2102NA02GQFN24, Arrow Part Number=CP2102N-A02-GQFN24, Arrow Price/Stock=https://www.arrow.com/en/products/cp2102n-a02-gqfn24/silicon-labs, Datasheet Link=https://componentsearchengine.com/Datasheets/1/CP2102N-A02-GQFN24.pdf, Height=0.8mm, Manufacturer_Part_Number=CP2102N-A02-GQFN24, Mouser Price/Stock=https://www.mouser.co.uk/ProductDetail/Silicon-Labs/CP2102N-A02-GQFN24?qs=u16ybLDytRYKabtL%2FE7DZA%3D%3D
U6 U7: "Integrated Circuit", Manufacturer_Name="Texas Instruments", Mouser Part Number=595-SN74HC126D, Arrow Part Number=SN74HC126D, Arrow Price/Stock=https://www.arrow.com/en/products/sn74hc126d/texas-instruments, Datasheet Link=http://www.ti.com/lit/gpn/sn74hc126, Height=1.75mm, Manufacturer_Part_Number=SN74HC126D, Mouser Price/Stock=https://www.mouser.co.uk/ProductDetail/Texas-Instruments/SN74HC126D?qs=FM6NhYOeeBWM0b9Ig2w%252BaQ%3D%3D
X1: library part CMP-2000-05726-1, "Low Profile Crystal, 8.0 MHz, +/- 30 ppm, -20 to 70 degC, 2-Pin SMD, RoHS, Tape and Reel", Case Height=4.2mm, Case Length=11.4mm, Case Width=4.7mm, Frequency=8MHz, Frequency Stability=50PPM, Load Capacitance=18pF, Manufacturer=ABRACON, Operating Temperature Range=-20Cto+70C, Package / Case=HC-49/US, Package Description="2-Pin Surface Mount Device, Body 11.4 x 4.7 mm", Package Reference=ABLS-14.7456MHZ-B2-T, Tolerance=30PPM, Brand=ABRACON, Datasheet URL=http://www.abracon.com/Resonators/abls.pdf, Datasheet Version=04/2011, Dimensions=4.7mmWx11.4mmLx4.2mmH, ESR=80Ohms, Factory Pack Quantity=1000, Manufacturer URL=http://www.abracon.com/, Mounting Style=SMD/SMT, Mounting Technology=SurfaceMount, Package URL=http://www.abracon.com/Support/PackageDrawing/Resonators/ABLS-2D.pdf, Packaging=Reel, Product Category=Crystals, RoHS=Details, Series=ABLS, Termination Style=SMD/SMT, Type=LowProfileMicroprocessorCrystal

## Via types
v1: diameter 25, hole 15, Top Layer to Bottom Layer, 123 vias

## Nets (pads, with @x,y where several pads share a name; then routed paths per layer and width w, separated by ;. In a path a pad name is that pad's centre, name@x,y a point inside that pad or via, vN(x,y) a via of type N, cw(c..) or ccw(c..) an arc to the next point about the centre after c; other vN are vias at no path point)
GND: C1.2 C2.2 C3.2 C4.2 C5.2 C6.2 C7.2 C8.2 C9.2 C10.2 C11.2 C12.2 C13.2 C14.2 C15.2 C16.2 C17.2 C18.2 C19.2 C20.2 C21.2 C22.2 C23.2 C24.2 C25.2 C26.2 C27.2 C28.2 P1.2 P2.2 P3.2 P4.1 P5.1 P6.1 P7.3 P7.4 P9.2 P10.2 P11.2 P12.2 P13.A1 P13.A12 P13.B1 P13.B12 P13.MP1 P13.MP2 P13.MP3 P13.MP4 P14.2 R2.2 R4.2 R18.2 R20.2 R21.2 S1.1 U1.16 U1.31 U1.38 U1.51 U1.61 U1.83 U1.94 U1.107 U1.120 U1.130 U2.1 U3.2 U3.25 U6.7 U7.7 | length 7203.7
  Top Layer w10: P13.MP3 354.8,1833.54 P13.A1 ; v1(340,2745) 340,2655 410,2585 R20.2 ; P13.A12@353.9,1522.2 P13.A12 P13.B1 ; P13.B12 P13.A1 ; R21.2 447.84,2739.16 447.84,2712.16 465,2695 550,2695 v1(605,2750) ; v1(505,1830) 472.33,1830 429.22,1786.89 P13.A1 ; v1(600,2605) 600,2540.66 655.23,2485.43 672.32,2485.43 U3.2 U3.25@720.47,2484.53 ; v1(675,2190) 737.44,2190 C25.2 ; v1(1025,2300) 1025,2246.5 R18.2 ; v1(1095,1170) 1179.45,1170 S1.1 ; v1(1345,2065) 1391.81,2018.19 C16.2 ; v1(1345,2220) 1447.63,2220 C15.2 ; v1(1365,1760) 1446.25,1760 C17.2 ; v1(1485,2155) 1602.13,2037.87 U1.130 ; v1(1530,2525) 1575,2525 1620,2570 1620,2680 1670.75,2730.75 C14.2@1732,2730.75 ; U1.120 1735.83,2234.72 1766.11,2265 v1(1995,2265) ; v1(1700,1455) 1734.7,1455 1760.33,1480.63 C3.2 ; U1.107 1752.34,2526.63 1752.34,2377.66 v1(1755,2375) ; v1(1955,1415) 1957.87,1417.87 1980.11,1417.87 C4.2@2042.87,1480.63 ; C13.2 1987.75,2730 v1(2060,2730) ; v1@2005,2265 v1(1995,2265) ; v1@2005,2267.87 2019.08,2267.87 2224.34,2473.13 U1.83 ; U1.94 2007.81,2494.11 2004.27,2490.57 2004.27,2427.24 2035,2396.51 2035,2305 v1(1995,2265) ; U1.16 2027.49,1589.65 2017.51,1579.67 2017.51,1505.98 C4.2@2042.87,1480.63 ; C4.2 C4.2@2042.87,1480.63 ; C12.2 2354.25,2730.75 v1(2355,2730) ; v1(2235,1365) 2235,1478.63 C5.2 ; v1(2290,1800) 2322.77,1767.23 U1.31 ; C6.2 2320,1477.63 v1(2320,1365) ; v1(2370,1905) 2370,1873.47 2461.07,1782.41 2496.56,1782.41 U1.38 ; C7.2 2390,1477.63 v1(2390,1365) ; U1.51 2437.13,2037.87 2395,2080 v1(2395,2140) 2395,2190 2439.72,2234.72 U1.61 ; C8.2 2707.75,1800 v1(2830,1800) ; C10.2 2704.56,2249.06 2714.91,2238.7 2719.05,2238.7 2742.75,2215 v1(2830,2215) ; C11.2 2704.56,2389.06 2714.91,2378.7 2719.05,2378.7 2777.75,2320 v1(2830,2320) ; C9.2 v1(2830,2060)
  Bottom Layer w10: C24.2 935,1370 v1(975,1330) ; U6.7 1120,489 1170,539 v1(1170,580) ; v1(1310,1310) C23.2 ; v1(1690,750) C22.2 ; C2.2 1875,2100 v1(1930,2045) ; R2.2 v1(2095,1880) ; C19.2 2072.56,1242.56 v1(2145.74,1315.74) ; v1(2145,1195) 2145,1019.61 U2.1 ; v1(2210,760) 2217.65,767.65 2244.11,767.65 2318.03,841.57 C20.2 ; C18.2 2320.35,1252.91 2397.91,1252.91 v1(2430,1285) ; U7.7 2410,489 2471.16,550.15 2471.16,557.13 v1(2474.03,560) ; v1(2445,875) 2475,905 2475,952.44 C21.2 ; v1(2725,1050) 2725,1108.5 ; C1.2 2927.48,2430 v1(3030,2430)
  other v1: 750,2455
NetC1_1: C1.1 U1.71 | length 500.4
  Top Layer w10: U1.71 2464.04,2431.57 2460.51,2435.11 2457.97,2435.11 2448.51,2444.57 2448.51,2457.95 2520.56,2530 v1(2570,2530)
  Bottom Layer w10: v1(2570,2530) 2626.1,2473.9 2777.09,2473.9 2807.52,2443.46 C1.1
NetC2_1: C2.1 U1.106 | length 292.4
  Top Layer w10: U1.106 1771.59,2450.91 v1(1807.5,2415)
  Bottom Layer w10: v1(1807.5,2415) 1875,2347.5 C2.1
NetC18_1: C18.1 U1.23 X1.1 | length 1004.9
  Top Layer w10: v1(2095,1410) 2095,1455.82 2165.29,1526.11 U1.23 ; X1.1 2277.01,1097.01 2392.13,1212.13 2427.13,1212.13 v1(2430,1215)
  Bottom Layer w10: v1(2095,1410) 2097.87,1407.13 2097.87,1395.44 2305.87,1187.44 2398.38,1187.44 2425.94,1215 v1(2430,1215)
NetC19_1: C19.1 R3.1 X1.2 | length 591.3
  Top Layer w10: X1.2 1905.36,1047.37 2022.37,1047.37 2047.35,1072.35 2047.35,1087.35 v1(2055,1095)
  Bottom Layer w10: R3.1 1845,1135 1880,1100 2050,1100 v1(2055,1095) ; R3.1@1845.98,1182.01 1974.57,1182.01 C19.1
NetC23_1: C23.1 C24.1 P1.1 P7.1 R26.1 R27.1 S1.3 U1.25 | length 3547
  Top Layer w10: v1(640,1510) 640,1380 v1(710,1310) ; P1.1 873.58,991.42 S1.3 1266.42,991.42 v1(1360,1085) ; v1(1510,1515) 1611.42,1616.42 1611.42,1636.42 1709.97,1734.97 2191.66,1734.97 2201.12,1725.5 2201.12,1722.97 2204.66,1719.44 U1.25
  Bottom Layer w10: P7.1 385,1080 785,1080 P1.1 795,1342.56 C24.1 770,1370 v1(710,1310) ; R27.1 583.5,1453.5 v1(640,1510) ; R26.1 1308.5,845.98 1360,897.48 v1(1360,1085) 1362.56,1087.56 1362.56,1367.44 1510,1514.88 v1(1510,1515)
NetLED1_1: LED1.1 R1.2 | length 204.8
  Top Layer w10: R1.2 2475,2865 2526.5,2813.5 LED1.1
NetLED2_1: LED2.1 R4.1 | length 426.2
  Top Layer w10: LED2.1 2606.5,1216.5 2650,1260 2650,1330 v1(2695,1375)
  Bottom Layer w10: v1(2695,1375) 2730,1340 R4.1
NetLED3_1: LED3.1 U3.13 | length 228.5
  Top Layer w10: U3.13 1049.29,2405.79 LED3.1
NetLED3_2: LED3.2 R24.1 | length 127
  Top Layer w10: LED3.2 R24.1
NetLED4_1: LED4.1 U3.14 | length 283.7
  Top Layer w10: U3.14 898.98,2425.47 LED4.1
NetLED4_2: LED4.2 R25.1 | length 132
  Top Layer w10: LED4.2 R25.1
NetP2_1: P2.1 R5.1 U1.89 | length 1220.7
  Top Layer w10: P2.1 1445,2870 1445,2795.82 1465,2775.82 v1(1465,2765) ; v1(2056.13,2792.3) 2092.7,2792.3 2150,2735 2150,2606.33 2109.77,2566.09 2109.77,2564.57 2109.77,2563.56 2106.23,2560.03 U1.89
  Bottom Layer w10: 1320,2816.5 1391.5,2816.5 P2.1 ; v1(1465,2765) 2026.86,2765 2054.16,2792.3 v1(2056.13,2792.3)
NetP3_1: P3.1 R6.1 U1.90 | length 1416
  Top Layer w10: P3.1 1095,2735 v1(1120,2710) ; v1(2055,2635) 2086.55,2603.45 U1.90 U1.90@2086.55,2513.53
  Bottom Layer w10: R6.1 1057.01,2837.01 P3.1 ; v1(1120,2710) 1483.43,2710 1558.43,2635 v1(2055,2635)
NetP4_2: P4.2 R23.2 U1.101 | length 1603.2
  Top Layer w10: P4.2 760,2802.99 827.72,2735.28 1040.94,2735.28 1140.61,2635.61 1405.61,2635.61 1541.1,2771.1 1761.84,2771.1 1870.01,2662.93 U1.101
NetP4_3: P4.3 R22.2 U1.102 | length 1678.1
  Top Layer w10: P4.3 660,2833.69 725,2768.69 R22.2 751.22,2720.28 1034.72,2720.28 1135,2620 1395,2620 1395.61,2620.61 1411.82,2620.61 1547.32,2756.1 1755.63,2756.1 1850.33,2661.41 U1.102
NetP5_2: P5.2 U1.69 | length 1131.9
  Top Layer w10: v1(2320,2225) 2327.65,2232.65 2327.65,2258.35 2457.97,2388.67 2460.51,2388.67 2464.04,2392.2 U1.69
  Bottom Layer w10: P5.2 2065,2940 2320,2685 v1(2320,2225)
NetP5_3: P5.3 U1.78 | length 611.1
  Top Layer w10: v1(2265,2640) 2322.77,2582.23 U1.78
  Bottom Layer w10: P5.3 1965,2940 v1(2265,2640)
NetP6_3: P6.3 R7.2 U1.137 | length 908.1
  Top Layer w10: v1(1135,1740) 1137.5,1742.5 1162.5,1742.5 1275,1855 1575.84,1855 1620.48,1899.64 1655.97,1899.64 U1.137
  Bottom Layer w10: P6.3 965,1689.49 1014.02,1738.5 1015,1738.5 1016.5,1740 v1(1135,1740)
NetP6_4: P6.4 R8.2 U1.136 | length 1088.1
  Top Layer w10: v1(945,1770) 1168.79,1770 1268.79,1870 1569.63,1870 1618.95,1919.32 1655.97,1919.32 U1.136
  Bottom Layer w10: P6.4 837.01,1587.99 837.01,1738.5 838.5,1740 838.5,1746.02 862.48,1770 v1(945,1770)
NetP7_2: P7.2 U1.105 | length 2461.6
  Top Layer w10: v1(1785,2300) 1835,2350 1835,2447.85 1794.81,2488.04 1794.81,2489.57 1794.81,2490.57 1791.27,2494.11 U1.105
  Bottom Layer w10: P7.2 443.1,1128.1 483.1,1128.1 805,1450 805,1908.79 1311.21,2415 1485,2415 1600,2300 v1(1785,2300)
NetP7_5: P7.5 U1.133 U6.6 | length 3078.9
  Top Layer w10: P7.5 390,975 635.66,975 797.27,1136.61 971.61,1136.61 v1(1175,1340) 1247.5,1267.5 1282.5,1267.5 v1(1325,1225) ; v1(1340,1945) 1520,1945 1553.82,1978.82 U1.133
  Bottom Layer w10: U6.6 1070,731.37 1325,986.37 v1(1325,1225) ; v1(1175,1340) 1175,1484.1 1220,1529.1 1220,1845 1320,1945 v1(1340,1945)
NetP7_6: P7.6 U1.109 | length 2515.5
  Top Layer w10: v1(1395,2460) 1405.82,2460 1414.56,2451.26 U1.109
  Bottom Layer w10: P7.6 383.96,981.04 321.79,981.04 295,1007.84 295,1180 320,1205 538.79,1205 790,1456.21 790,1915 1335,2460 v1(1395,2460)
NetP8_1: P8.1 U1.5 | length 2023.9
  Top Layer w10: v1(575,1980) 605,2010 820,2010 v1(890,1940) ; v1(1195.01,1635.01) 1367.52,1462.5 1588.51,1462.5 1734,1607.99 1769.49,1607.99 1810.52,1649.01 1810.52,1686.04 U1.5
  Bottom Layer w10: P8.1 542.8,2197.2 585,2155 585,1993.36 575,1983.36 v1(575,1980) ; v1(890,1940) 949.76,1880.24 1099.76,1880.24 1195.89,1784.11 1195.89,1635.89 v1(1195.01,1635.01)
NetP8_2: P8.2 U1.7 | length 2143.7
  Top Layer w10: v1(680,1905) 925,1660 1138.2,1660 1370.7,1427.5 1822.85,1427.5 1903.03,1507.67 1903.03,1554.54 1850.33,1607.24 U1.7
  Bottom Layer w10: P8.2 532.21,2236.57 600,2168.79 600,1985 v1(680,1905)
NetP8_3: P8.3 U1.4 | length 1901
  Top Layer w10: v1(740,1905) 740,1866.21 931.21,1675 1235,1675 1432.5,1477.5 1582.3,1477.5 1727.78,1622.99 1763.28,1622.99 1790.83,1650.54 1790.83,1686.04 U1.4
  Bottom Layer w10: P8.3 514.06,2275.94 615,2175 615,2030 v1(740,1905)
NetP8_4: P8.4 U1.2 | length 1869.7
  Top Layer w10: v1(740,1965) 840.53,1864.47 840.53,1786.9 937.43,1690 1245,1690 1442.5,1492.5 1576.08,1492.5 1721.57,1637.99 1746.04,1637.99 1751.9,1643.85 U1.2
  Bottom Layer w10: P8.4 495.9,2315.32 630,2181.21 630,2075 v1(740,1965)
NetP8_5: P8.5 U1.76 | length 2637.6
  Top Layer w10: v1(2215,2175) 2416.51,2376.51 2416.51,2447.16 2437.34,2468 2437.34,2566.09 2427.88,2575.56 2375.13,2575.56 2365.67,2566.09 2365.67,2563.56 2362.14,2560.03 U1.76
  Bottom Layer w10: P8.5 519.68,2354.68 738.18,2573.18 1746.82,2573.18 2145,2175 v1(2215,2175)
NetP8_6: P8.6 U1.74 | length 2382.1
  Top Layer w10: v1(2215,2230) 2401.51,2416.51 U1.74
  Bottom Layer w10: P8.6 537.84,2394.06 731.97,2588.18 1816.82,2588.18 2175,2230 v1(2215,2230)
NetP8_7: P8.7 U1.75 | length 2286.7
  Top Layer w10: v1(2215,2290) 2381.82,2456.82 U1.75
  Bottom Layer w10: P8.7 556,2433.43 725.75,2603.18 728.18,2603.18 730,2605 1815,2605 1816.82,2603.18 1823.03,2603.18 2136.21,2290 v1(2215,2290)
NetP8_8: P8.8 U1.77 | length 2190.8
  Top Layer w10: v1(2212.5,2342.5) 2342.45,2472.45 U1.77
  Bottom Layer w10: P8.8 574.16,2472.8 721.36,2620 1827.43,2620 2104.93,2342.5 v1(2212.5,2342.5)
NetP9_3: P9.3 R10.1 U6.2 | length 580.6
  Bottom Layer w10: R10.1 565.98,396.5 597.47,427.98 843.44,427.98 870,454.55 U6.2 870,628.31 P9.3 ; R10.1@565,401.5 R10.1@570,406.5
NetP9_4: P9.4 R9.1 U6.5 | length 651.1
  Bottom Layer w10: R9.1 726.5,355 978.33,355 1020,396.67 U6.5 P9.4
NetP10_3: P10.3 R12.1 U6.12 | length 800.6
  Bottom Layer w10: U6.12 920,275.45 927.8,283.25 930.13,283.25 945.13,298.25 1013.25,298.25 1111.5,396.5 R12.1 1310.98,396.5 1457,542.51 P10.3
NetP10_4: P10.4 R11.1 U6.9 | length 885.8
  Bottom Layer w10: U6.9 1077.8,250.43 1077.8,222.2 1130,170 1250,170 1364.57,284.57 1364.57,379.57 1381.5,396.5 1410.98,396.5 1557,542.51 P10.4
NetP11_3: P11.3 R14.1 U7.2 | length 605.5
  Bottom Layer w10: R14.1 1920,455 1976.79,511.79 2137.2,511.79 U7.2@2160,489 ; P11.3 2160,515.31 U7.2@2160,489 ; U7.2 U7.2@2160,489
NetP11_4: P11.4 R13.1 U7.5 | length 739.4
  Bottom Layer w10: R13.1 2251.95,396.5 2310,454.55 U7.5 2315.4,477.17 2315.4,510.4 2340,535 2340,595 2313.38,621.62 2153.69,621.62 P11.4
NetP12_3: P12.3 R16.1 U7.12 | length 791.1
  Bottom Layer w10: U7.12 2210,275.45 2318.33,383.78 2602.28,383.78 R16.1@2612,393.5 ; P12.3 2512,494.5 2596.3,410.2 2596.3,409.21 2609.02,396.5 R16.1
NetP12_4: P12.4 R15.1 U7.9 | length 806.4
  Bottom Layer w10: U7.9 2360,241 2382.8,218.21 2583.21,218.21 2660,295 2660,342.48 2714.02,396.5 2612,498.51 P12.4
NetP13_A5: P13.A5 R20.1 | length 1049.7
  Top Layer w10: P13.A5 353.9,1705.12 319.88,1705.12 282.8,1742.2 282.8,1903.24 319.56,1940 361.21,1940 445,2023.79 445,2450 511.5,2516.5 R20.1
NetP13_A6: P13.A6 P13.B6 U3.3 | length 1678.5
  Top Layer w10: P13.B6 355.71,1624.57 503.09,1624.57 v1(505,1622.66) ; P13.A6 429.84,1664.84 ; v1(505,1715) 480,1715 429.84,1664.84 ; U3.3 484.84,2464.84 460,2440 460,2020 610,1870 610,1730 544.84,1664.84 429.84,1664.84
  Bottom Layer w10: v1(505,1622.66) 507.87,1625.53 530.53,1625.53 545,1640 545,1700 530,1715 v1(505,1715)
NetP13_A7: P13.A7 P13.B7 U3.4 | length 1371.2
  Top Layer w10: P13.B7 353.9,1683.62 330.9,1683.62 322.17,1674.89 322.17,1654.79 330.9,1646.06 353.9,1646.06 P13.A7 546.37,1645.16 625,1723.79 625,1876.21 475,2026.21 475,2433.79 486.37,2445.16 U3.4
NetP13_B5: P13.B5 R21.1 | length 1531.9
  Top Layer w10: P13.B5 353.9,1587.01 330.9,1587.01 267.8,1650.11 267.8,1909.45 320,1961.65 320,2254.2 270,2304.2 270,2745 317.22,2792.22 457.78,2792.22 R21.1
NetR1_1: R1.1 U1.96 | length 676.2
  Top Layer w10: U1.96 1968.44,2645.21 1957.51,2656.13 1957.51,2750.24 2072.27,2865 R1.1
NetR2_1: R2.1 U1.138 | length 239.3
  Top Layer w10: U1.138 1656.61,1880.2 1794.8,1880.2 v1(1795,1880)
  Bottom Layer w10: v1(1795,1880) 1895,1880 R2.1@1895.39,1880.39
NetR3_2: R3.2 U1.24 | length 664.3
  Top Layer w10: v1(1935,1300) 2040,1300 2185,1445 U1.24
  Bottom Layer w10: R3.2 1845.98,1245 1895,1294.02 1929.02,1294.02 v1(1935,1300)
NetR17_2: R17.2 R18.1 U3.8 | length 417.8
  Top Layer w10: U3.8 721.38,2377.32 721.38,2333.62 770,2285 831.21,2285 869.72,2246.5 R17.2 ; R17.2@930,2245 963.5,2245 1016.3,2192.2 1016.3,2191.22 1029.02,2178.5 R18.1
NetR19_2: R19.2 U3.9 | length 568.2
  Top Layer w10: U3.9 741.06,2377.32 741.06,2360.23 761.29,2340 1050,2340 1090,2300 1090,2205 1116.5,2178.5 R19.2
NetR22_1: R22.1 U3.21 | length 166.2
  Top Layer w10: R22.1 725,2631.61 759.84,2596.77 U3.21
NetR23_1: R23.1 U3.20 | length 167.9
  Top Layer w10: U3.20 779.53,2594.53 815,2630 R23.1
NetU1_34: U1.34 U6.8 | length 2411.1
  Top Layer w10: U1.34 2381.82,1638.18 2418.78,1601.22 2458.78,1601.22 2490,1570 2490,1545 v1(2460,1515)
  Bottom Layer w10: U6.8 1151.41,258.23 1254.4,361.22 1325.28,361.22 1349.57,385.51 1349.57,413.87 1496.53,560.83 1496.53,1038.35 1975.68,1517.5 2457.5,1517.5 v1(2460,1515)
NetU1_35: U1.35 U6.11 | length 2724.1
  Top Layer w10: U1.35 2401.95,1686.04 2401.95,1650.54 2436.27,1616.22 2483.78,1616.22 v1(2540,1560)
  Bottom Layer w10: U6.11 970,241 947.2,218.21 903.06,218.21 897.2,224.07 897.2,292.39 944.81,340 1033.79,340 1105.28,411.5 1146.09,411.5 1417.47,682.88 1417.47,980.51 1974.47,1537.5 2517.5,1537.5 v1(2540,1560)
NetU1_81: U1.81 U7.8 | length 2585.6
  Top Layer w10: U1.81 2263.71,2466.79 2267.5,2463 2267.5,2429.32 2139.82,2301.64 2139.82,2064.28 2562.5,1641.61 2562.5,1270.68 2422.5,1130.68 2422.5,750.82 2451.53,721.79 2451.53,336.53 v1(2450,335)
  Bottom Layer w10: U7.8 2410,275.45 2447.13,312.58 2447.13,332.13 v1(2450,335)
NetU1_82: U1.82 U7.11 | length 3046.8
  Top Layer w10: U1.82 2244.47,2526.63 2244.47,2445.53 v1(2245,2445)
  Bottom Layer w10: v1(2245,2445) 2297.5,2392.5 2297.5,1945.68 2632.48,1610.7 2632.48,1110.7 2743.7,999.48 2743.7,311.65 2589.56,157.5 2300.68,157.5 2260,198.18 U7.11
NetU1_110: U1.110 U6.3 | length 2343.8
  Top Layer w10: v1(1420,2330) 1521.57,2431.57 U1.110
  Bottom Layer w10: U6.3 920,622.41 980.47,682.88 980.47,880.47 1262.5,1162.5 1262.5,1407.5 1420,1565 v1(1420,2330)
NetU1_134: U1.134 U7.3 | length 1959.5
  Top Layer w10: v1(1510,1910) 1559.13,1959.13 U1.134 ; v1(1620,1340) 1782.76,1177.24 1782.76,1098.96 1782.85,1098.86 1782.85,1090.58 1782.76,1090.48 1782.76,997.24 1820,960 1930,960 2050,840 v1(2050,770)
  Bottom Layer w10: v1(1510,1910) 1510,1825 1620,1715 v1(1620,1340) ; v1(2050,770) 2050,649 2210,489 U7.3
NetU1_135: U1.135 U7.6 | length 2321.7
  Top Layer w10: U1.135 1656.69,1939.72 1794.72,1939.72 v1(1795,1940)
  Bottom Layer w10: v1(1795,1940) 2205,1940 2617.48,1527.52 2617.48,893.38 2596.58,872.48 2550.27,872.48 2360,682.21 U7.6
V3.3: C22.1 L3.1 LED2.2 U2.2 U2.4 | length 1198
  Top Layer w10: v1(1620,1270) v1(1690,1200) ; v1(2520,1100) 2520,1102.99 2543.5,1126.5 LED2.2
  Bottom Layer w10: L3.1 v1(1620,1270) ; v1(1690,1200) C22.1 C22.1@1691.97,1033.43 ; U2.4 U2.2 2152.05,925 2213.64,986.59 2213.64,1034.79 2278.85,1100 v1(2520,1100)
V3.3a: C3.1 C4.1 C5.1 C6.1 C7.1 C8.1 C9.1 C10.1 C11.1 C12.1 C13.1 C14.1 C15.1 C16.1 C17.1 L3.2 LED1.2 P4.4 P5.4 P7.7 P7.8 R5.2 R6.2 R26.2 R27.2 U1.6 U1.17 U1.30 U1.32 U1.33 U1.39 U1.52 U1.62 U1.72 U1.84 U1.95 U1.108 U1.121 U1.131 U1.144 | length 5209.5
  Top Layer w10: C16.1 U1.131 1730.62,2018.19 1755,2042.57 v1(1755,2075) ; C15.1 1620.3,2218.19 1623.45,2215.04 U1.121 1750.98,2215.04 1755.94,2220 v1(1760,2220) ; v1(1580,1715) 1579.75,1715.25 1552.5,1715.25 1519.05,1748.7 1514.91,1748.7 1504.56,1759.06 C17.1 1505.46,1762.28 U1.144 ; v1(1645,2527.3) 1645.24,2527.07 U1.108 1732.22,2675.41 C14.1@1732,2675.63 ; v1(1700,1535) 1826.25,1535 C3.1 1827,1649.87 1830.64,1653.52 U1.6 ; v1(1985,2370) 1987.68,2372.68 1987.68,2526.63 U1.95 1988.12,2560.03 1987,2561.15 C13.1 ; U1.17 2047.18,1535.93 C4.1 2080.75,1535.75 v1(2115,1570) ; v1(2120,2450) 2180,2450 2204.66,2474.66 U1.84 2204.66,2560.03 2202,2562.69 C12.1 ; v1(2207.5,1595) 2207.5,1561.11 2232.87,1535.75 C5.1 ; U1.30 2303.08,1632.85 2237,1566.77 C5.1 ; U1.32 2342.45,1612.54 2317,1587.08 C6.1 ; U1.33 2362.45,1686.16 2362.45,1611.93 2387,1587.38 C7.1 C6.1 ; U1.39 2529.96,1801.65 2531.5,1803.19 C8.1 2649.44,1730.56 v1(2680,1700) ; U1.52 2650,2057.56 C9.1 2652.44,1977.56 v1(2680,1950) ; U1.62 2529.96,2254.41 2531.18,2253.19 C10.1 2649.44,2185.56 v1(2675,2160) ; U1.72 2555.49,2451.26 2613.56,2393.19 C11.1 2649.44,2397.32 2659.8,2407.68 2660.63,2407.68 2685,2432.05 v1(2685,2580) ; LED1.2 v1(2605,2975) ; C5.1 C6.1
  Bottom Layer w10: R27.2 646.5,1370.98 710,1434.49 v1(710,1600) ; v1(970,2675) 970,2773.31 R6.2 R6.2@972.2,2775.51 ; v1(1230,2770) 1234.06,2770 1239.06,2775 1323.5,2775 R5.2 ; R26.2 1371.5,845.98 1402.47,876.96 1402.47,1302.47 v1(1430,1330) 1514.06,1330 L3.2
V5: C20.1 C21.1 C25.1 C26.1 P6.2 P9.1 P10.1 P11.1 P12.1 P14.1 R7.1 R8.1 R9.2 R10.2 R11.2 R12.2 R13.2 R14.2 R15.2 R16.2 R17.1 U2.3 U3.7 U6.1 U6.4 U6.10 U6.13 U6.14 U7.1 U7.4 U7.10 U7.13 U7.14 | length 5336.9
  Top Layer w10: 700.79,2360.23 700.79,2329.76 740,2290.55 C25.1 C26.1 ; U3.7 701.69,2377.32 701.69,2360.23 ; C26.1@817.18,2244.74 850.26,2244.74 902.16,2192.84 920.66,2192.84 R17.1 930,1859.06 940,1849.06 v1(940,1845)
  Bottom Layer w10: v1(715,550) 715,547.07 732.98,529.09 732.98,522.02 783.23,471.77 ; P9.1 720,720 990,990 990,1136.58 1065,1211.58 P6.2 ; U6.1 783.23,471.77 ; R8.1 835.98,1806.5 848.7,1819.21 848.7,1820.2 873.5,1845 v1(940,1845) 995.51,1845 1039.02,1801.5 R7.1@1039.93,1801.5 ; U6.13 U6.14 761.26,258.23 685.98,333.5 R9.2 R10.2 564.02,333.5 536.3,361.22 536.3,418.35 589.72,471.77 783.23,471.77 ; v1(970,390) U6.4 ; v1(1020,175) U6.10 ; v1(1240,220) 1310,290 R12.2 ; v1(1410,250) R11.2 ; R14.2 R13.2@2024.02,333.5 ; U2.3 2194.84,834.84 2240,880 2240,1015 2262.56,1037.56 C21.1 2445.48,1037.08 2467.92,1037.08 P14.1 ; U7.13 U7.14 2101.26,258.23 2025.98,333.5 R13.2 R13.2@2024.02,333.5 ; v1(2310,180) U7.10@2310,241 ; U7.10 U7.10@2310,241 ; v1(2310,565) 2290,565 2260,535 U7.4 2260,454.55 2230.45,425 2139.55,425 2110,454.55 U7.1 2049.72,471.77 1996.3,418.35 1996.3,361.22 R13.2@2024.02,333.5 ; v1(2510,335) 2608.5,335 R16.2 ; R15.2 2714.02,333.5 2675,294.49 2675,288.79 2589.42,203.21 2347.8,203.21 U7.10@2310,241
VDD3V3: C27.1 C28.1 R19.1 R24.2 R25.2 U3.5 U3.6 | length 665.4
  Top Layer w10: C28.1 602.56,2305 v1(680,2305) ; C27.1 597.56,2394.13 628.9,2425.47 U3.5 U3.6 645.79,2405.79 635,2395 635,2350 v1@677.94,2307.06 ; R19.1 1211.5,2241.5 v1(1260,2290) 1305,2335 1305,2408.5 R24.2 ; v1(1305,2515) 1305,2573.5 R25.2
pads on no net: P7.9 P7.10 P8.MP1 P8.MP2 P13.A4 P13.A8 P13.A9 P13.B4 P13.B8 P13.B9 P13.MH1 P13.MH2 S1.2 S1.4 U1.1 U1.3 U1.8 U1.9 U1.10 U1.11 U1.12 U1.13 U1.14 U1.15 U1.18 U1.19 U1.20 U1.21 U1.22 U1.26 U1.27 U1.28 U1.29 U1.36 U1.37 U1.40 U1.41 U1.42 U1.43 U1.44 U1.45 U1.46 U1.47 U1.48 U1.49 U1.50 U1.53 U1.54 U1.55 U1.56 U1.57 U1.58 U1.59 U1.60 U1.63 U1.64 U1.65 U1.66 U1.67 U1.68 U1.70 U1.73 U1.79 U1.80 U1.85 U1.86 U1.87 U1.88 U1.91 U1.92 U1.93 U1.97 U1.98 U1.99 U1.100 U1.103 U1.104 U1.111 U1.112 U1.113 U1.114 U1.115 U1.116 U1.117 U1.118 U1.119 U1.122 U1.123 U1.124 U1.125 U1.126 U1.127 U1.128 U1.129 U1.132 U1.139 U1.140 U1.141 U1.142 U1.143 U3.1 U3.10 U3.11 U3.12 U3.15 U3.16 U3.17 U3.18 U3.19 U3.22 U3.23 U3.24
copper on no net:
  other v1: 2320,945

## Polygon pours and split planes (outlines as drawn)
V3.3 on Bottom Layer "V3.3_L04_P000" (solid, pour order 0): 1602.5,977.5 1632.5,947.5 1727.5,947.5 1742.5,932.5 1832.5,842.5 2077.5,842.5 2122.5,887.5 2196.84,887.5 2196.84,963.16 2172.5,987.5 1932.5,987.5 1902.5,1017.5 1772.5,1017.5 1772.5,1092.5 1742.5,1122.5 1627.5,1122.5 1602.5,1097.5
GND on Top Layer "GND_L01_P004" (solid, pour order 4): 375,1395 400,1420 400,1530 385,1545 255,1545 230,1570 230,1905 220,1915 130,1915 120,1905 120,1415 140,1395
GND on Top Layer "GND_L01_P003" (solid, pour order 3): 515,2430 495,2410 495,2185 530,2150 845,2150 860,2165 860,2200 845,2215 605,2215 570,2250 570,2420 560,2430
GND on GND (split plane): 3084.9,2946.68 3084.9,263.32 2946.68,125.1 263.32,125.1 125.1,263.32 125.1,2946.68 263.32,3084.9 2946.68,3084.9
V3.3a on Power (split plane): 3084.9,2946.68 3084.9,263.32 2946.68,125.1 263.32,125.1 125.1,263.32 125.1,2946.68 263.32,3084.9 2946.68,3084.9
VDD3V3 on Power (split plane): 1344.9,2592.89 1344.9,2312.11 1252.89,2220.1 1107.11,2220.1 1083.6,2243.6 1081.95,2244.71 1080,2245.1 602.11,2245.1 575.1,2272.11 575.1,2422.89 597.11,2444.9 682.89,2444.9 699.9,2427.89 699.9,2375 700.29,2373.05 701.4,2371.4 731.4,2341.4 733.05,2340.29 735,2339.9 1195,2339.9 1196.95,2340.29 1198.6,2341.4 1223.6,2366.4 1224.71,2368.05 1225.1,2370 1225.1,2592.89 1247.11,2614.9 1322.89,2614.9
V5 on Power (split plane): 769.9,707.89 769.9,495 770.29,493.05 771.4,491.4 811.4,451.4 813.05,450.29 815,449.9 1155,449.9 1156.95,450.29 1158.6,451.4 1208.6,501.4 1209.71,503.05 1210.1,505 1210.1,702.89 1227.11,719.9 1287.89,719.9 1304.9,702.89 1304.9,495 1305.29,493.05 1306.4,491.4 1346.4,451.4 1348.05,450.29 1350,449.9 1685,449.9 1686.95,450.29 1688.6,451.4 1743.6,506.4 1744.71,508.05 1745.1,510 1745.1,692.89 1772.11,719.9 1827.89,719.9 1849.9,697.89 1849.9,500 1850.29,498.05 1851.4,496.4 1896.4,451.4 1898.05,450.29 1900,449.9 2210,449.9 2211.95,450.29 2213.6,451.4 2258.6,496.4 2259.71,498.05 2260.1,500 2260.1,712.89 2277.11,729.9 2337.89,729.9 2359.9,707.89 2359.9,510 2360.29,508.05 2361.4,506.4 2411.4,456.4 2413.05,455.29 2415,454.9 2672.89,454.9 2694.9,432.89 2694.9,197.11 2647.89,150.1 682.11,150.1 640.1,192.11 640.1,697.89 677.11,734.9 742.89,734.9
V5 on Power (split plane): 1239.9,1847.89 1239.9,1255 1240.29,1253.05 1241.4,1251.4 1351.4,1141.4 1353.05,1140.29 1355,1139.9 2417.89,1139.9 2536.4,1021.4 2538.05,1020.29 2540,1019.9 2622.89,1019.9 2629.9,1012.89 2629.9,915 2629.9,897.11 2612.89,880.1 2505,880.1 2503.05,879.71 2501.4,878.6 2491.4,868.6 2432.89,810.1 1077.11,810.1 1020.1,867.11 1020.1,1645 1019.71,1646.95 1018.6,1648.6 973.6,1693.6 971.95,1694.71 970,1695.1 832.11,1695.1 810.1,1717.11 810.1,1867.89 837.11,1894.9 1192.89,1894.9

## Other copper
Power (plane layer: these items are gaps in the copper):
  lines w10: 570,2270 600,2240 1080,2240 1105,2215 1255,2215 1350,2310 1350,2595 1325,2620 1245,2620 1220,2595 1220,2370 1195,2345 735,2345 705,2375 705,2430 685,2450 595,2450 570,2425 570,2270 ; 635,190 680,145 2650,145 2700,195 2700,435 2675,460 2415,460 2365,510 2365,710 2340,735 2275,735 2255,715 2255,500 2210,455 1900,455 1855,500 1855,700 1830,725 1770,725 1740,695 1740,510 1685,455 1350,455 1310,495 1310,705 1290,725 1225,725 1205,705 1205,505 1155,455 815,455 775,495 775,710 745,740 675,740 635,700 635,190 ; 805,1715 830,1690 970,1690 1015,1645 1015,865 1075,805 2435,805 2495,865 2505,875 2595,875 2615,875 2635,895 2635,915 2635,1015 2625,1025 2540,1025 2420,1145 1430,1145 1355,1145 1245,1255 1245,1850 1195,1900 835,1900 805,1870 805,1715

## Silkscreen, mask and mechanical layers (free items; w line width, h text height)
Top Overlay:
  drawing of 20 lines, arcs and shapes, not listed
  text "GND" at 1155,3020 h30
  text "GND" at 1510,3020 h30
  text "V3.3" at 500,2820 h30
  text "RX" at 645,2820 h30
  text "TX" at 740,2820 h30
  text "GND" at 830,2820 h30
  text "V3.3" at 1805,2820 h30
  text "RX" at 1950,2820 h30
  text "TX" at 2045,2820 h30
  text "GND" at 2135,2820 h30
  text "SCL" at 815,1395 h30
  text "SDA" at 925,1395 h30
  text "V5" at 1035,1395 h30
  text "GND" at 1125,1395 h30
  text "1" at 330,1350 h30
  text "2" at 430,1350 h30
  text "EUROBOT 2023" at 2680,1260 h45
  text "V5" at 2455,915 h30
  text "NRST" at 1155,905 h30
  text "NRST" at 740,900 h30
  text "GND" at 2425,805 h30
  text "5V" at 695,725 h30
  text "GND" at 780,725 h30
  text "1A" at 895,725 h30
  text "1B" at 995,725 h30
  text "5V" at 1235,725 h30
  text "GND" at 1315,725 h30
  text "2A" at 1430,725 h30
  text "2B" at 1530,725 h30
  text "5V" at 1770,725 h30
  text "GND" at 1860,725 h30
  text "3A" at 1975,725 h30
  text "3B" at 2075,725 h30
  text "5V" at 2285,725 h30
  text "GND" at 2375,725 h30
  text "4A" at 2490,725 h30
  text "4B" at 2590,725 h30
  text "9" at 330,460 h30
  text "10" at 420,460 h30
Bottom Overlay:
  drawing of 20 lines, arcs and shapes, not listed
  text "DIR1" at 565,2465 h20
  text "PWM1" at 565,2425 h20
  text "DIR2" at 565,2385 h20
  text "PWM2" at 565,2345 h20
  text "DIR3" at 565,2305 h20
  text "PWM3" at 565,2265 h20
  text "DIR4" at 565,2225 h20
  text "PWM4" at 565,2185 h20
  text "EUROBOT 2023" at 2990,1480 h75
  text "GND" at 2230,1005 h20
  text "V3.3" at 1855,915 h20
  text "V3.3" at 2245,915 h20
  text "V5" at 2210,825 h20
Drill Guide:
  circle w10: c230,305 r50.24
Mechanical 1:
  circle w40: c2980,2855 r50
  circle w40: c230,2855 r50
  circle w40: c230,305 r50
  circle w40: c2980,305 r50
  pour cut-out: 230,2805 cw(c230,2855) 180,2855 cw(c230,2855) 230,2905 cw(c230,2855) 280,2855 cw(c230,2855)
  lines w40: 105,255 105,2955 255,3105 2955,3105 3105,2955 3105,255 2955,105 255,105 105,255

## Dimensions
3560,105 to 3505,3105 on Mechanical 1
105,3205 to 3105,3295 on Mechanical 1